# EAGLE board cpu (EAGLE 4.15), part 1 of 3
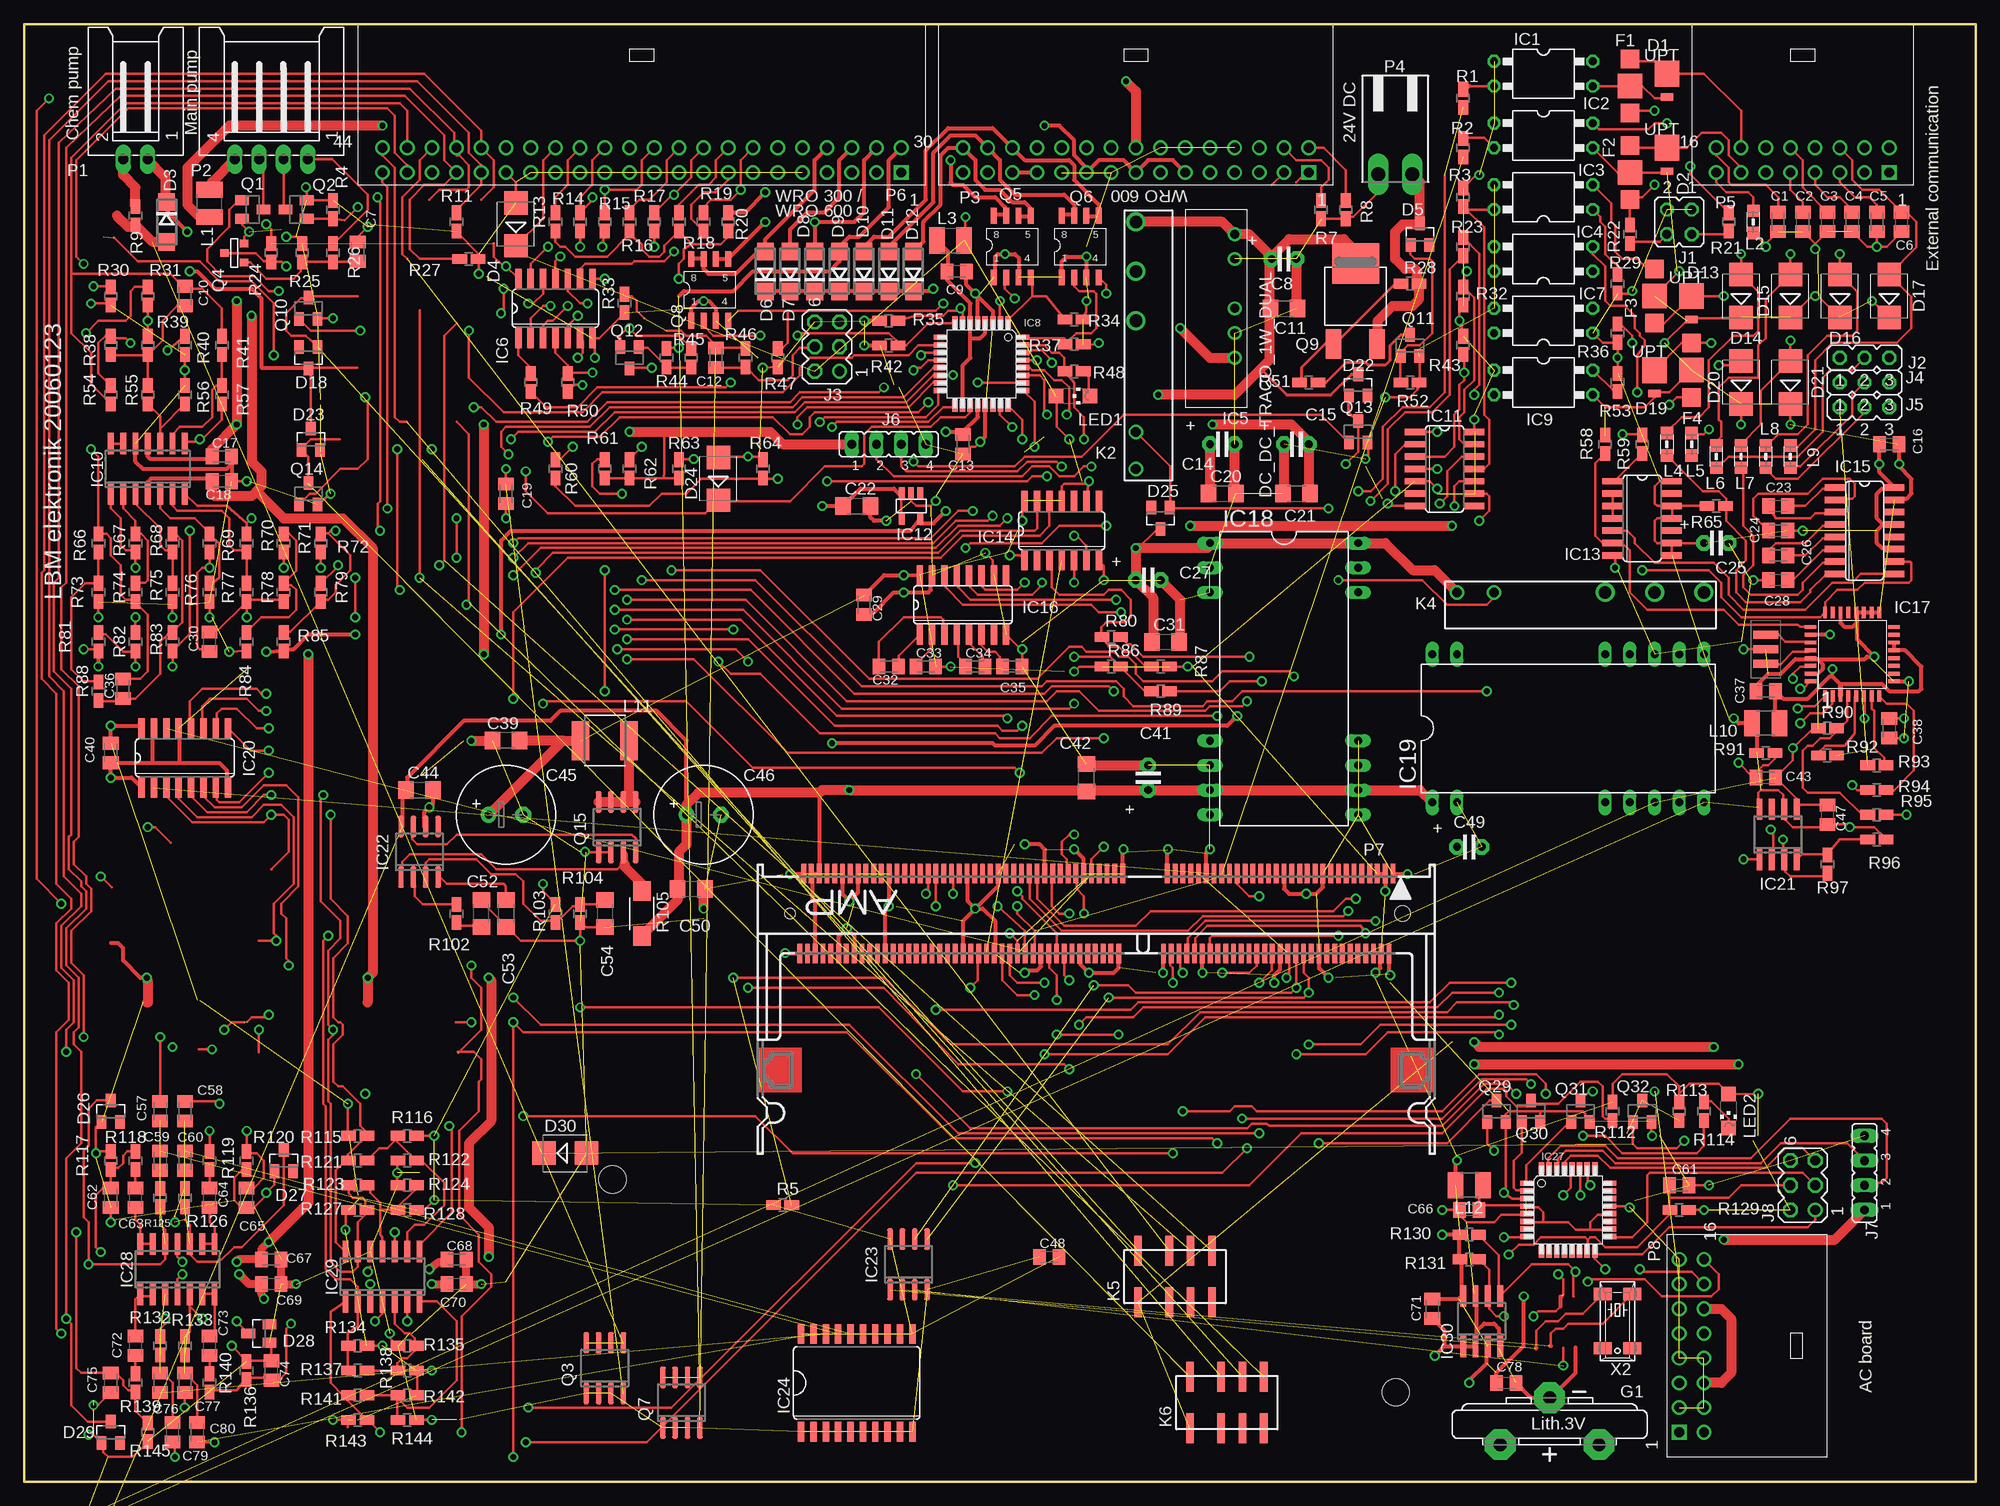
[diagram p0: board, top side]
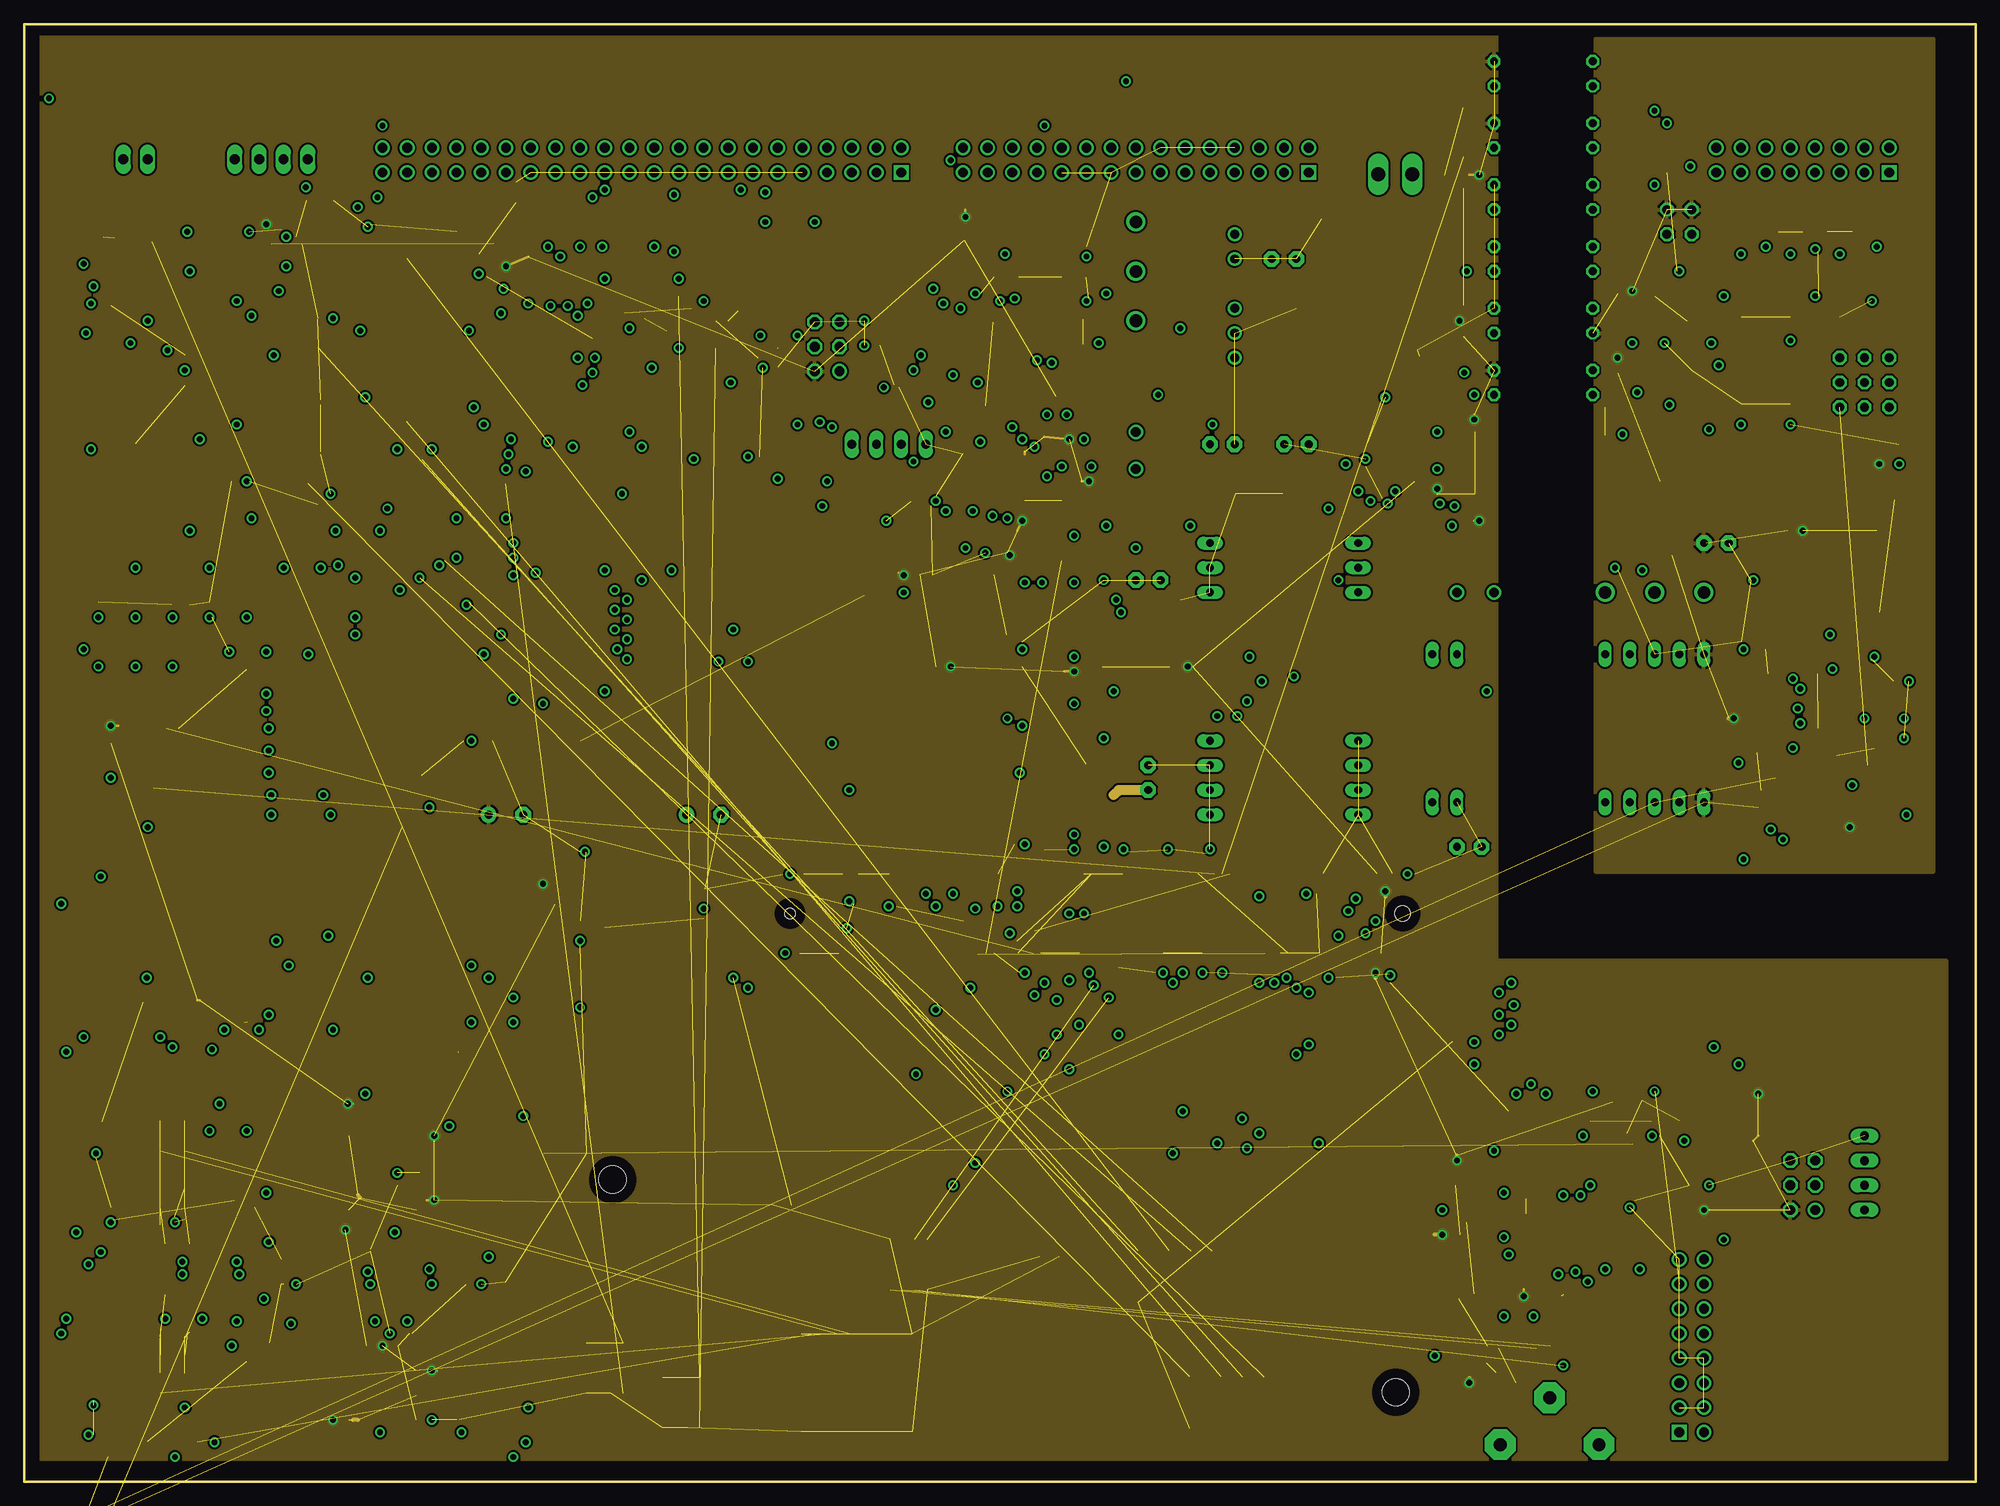
[diagram p1: board, inner layer Route2]
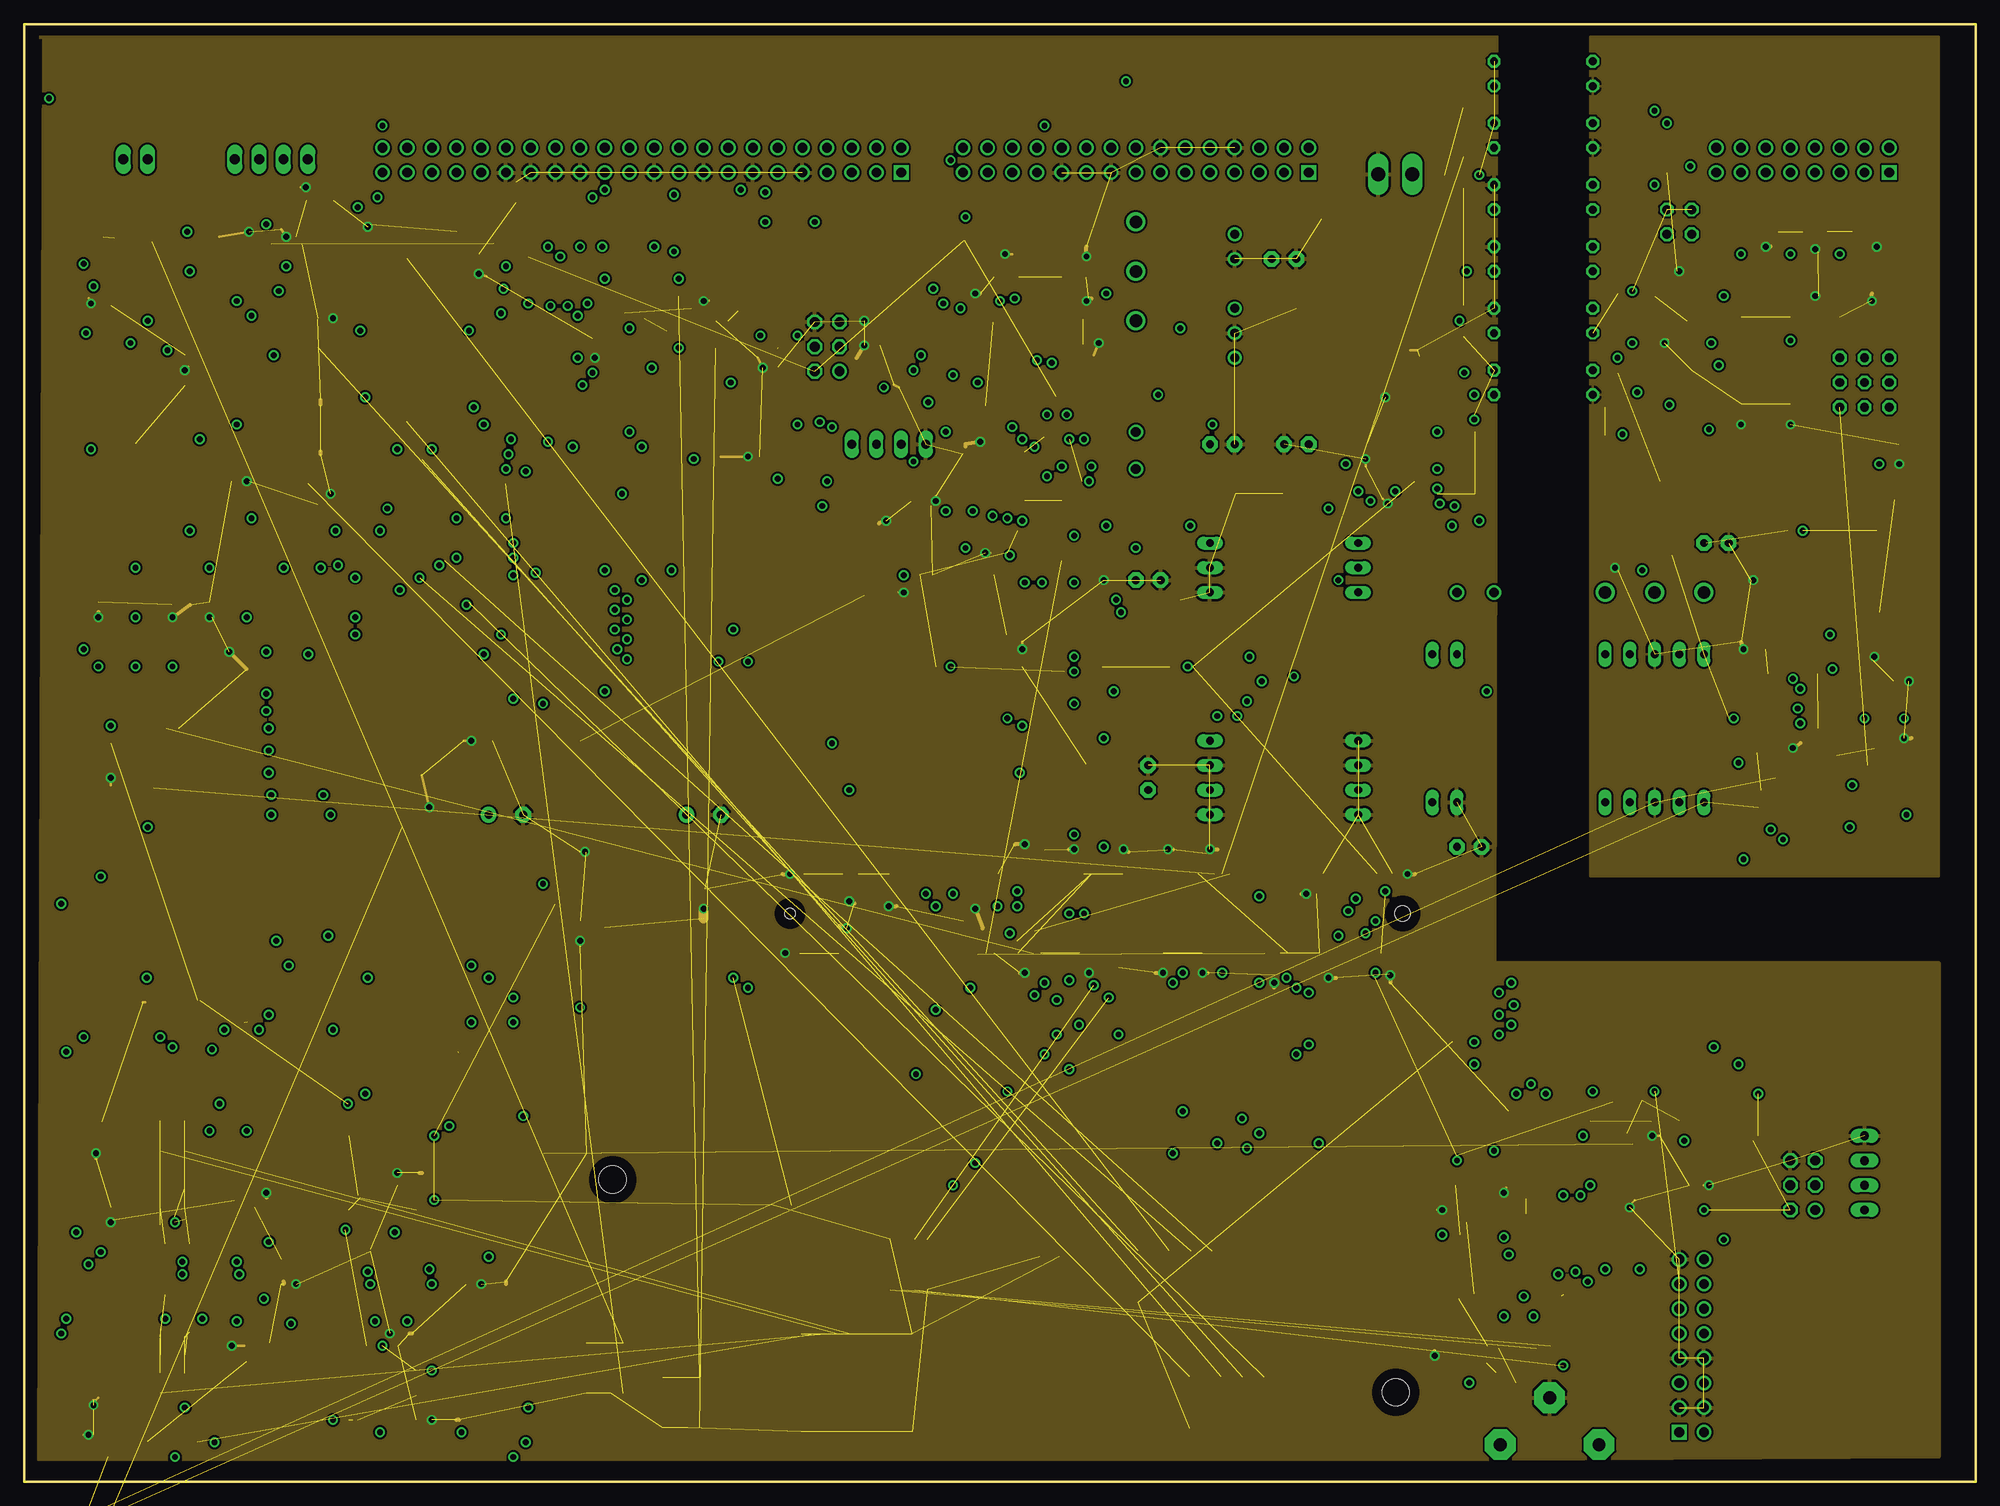
[diagram p2: board, inner layer Route15]
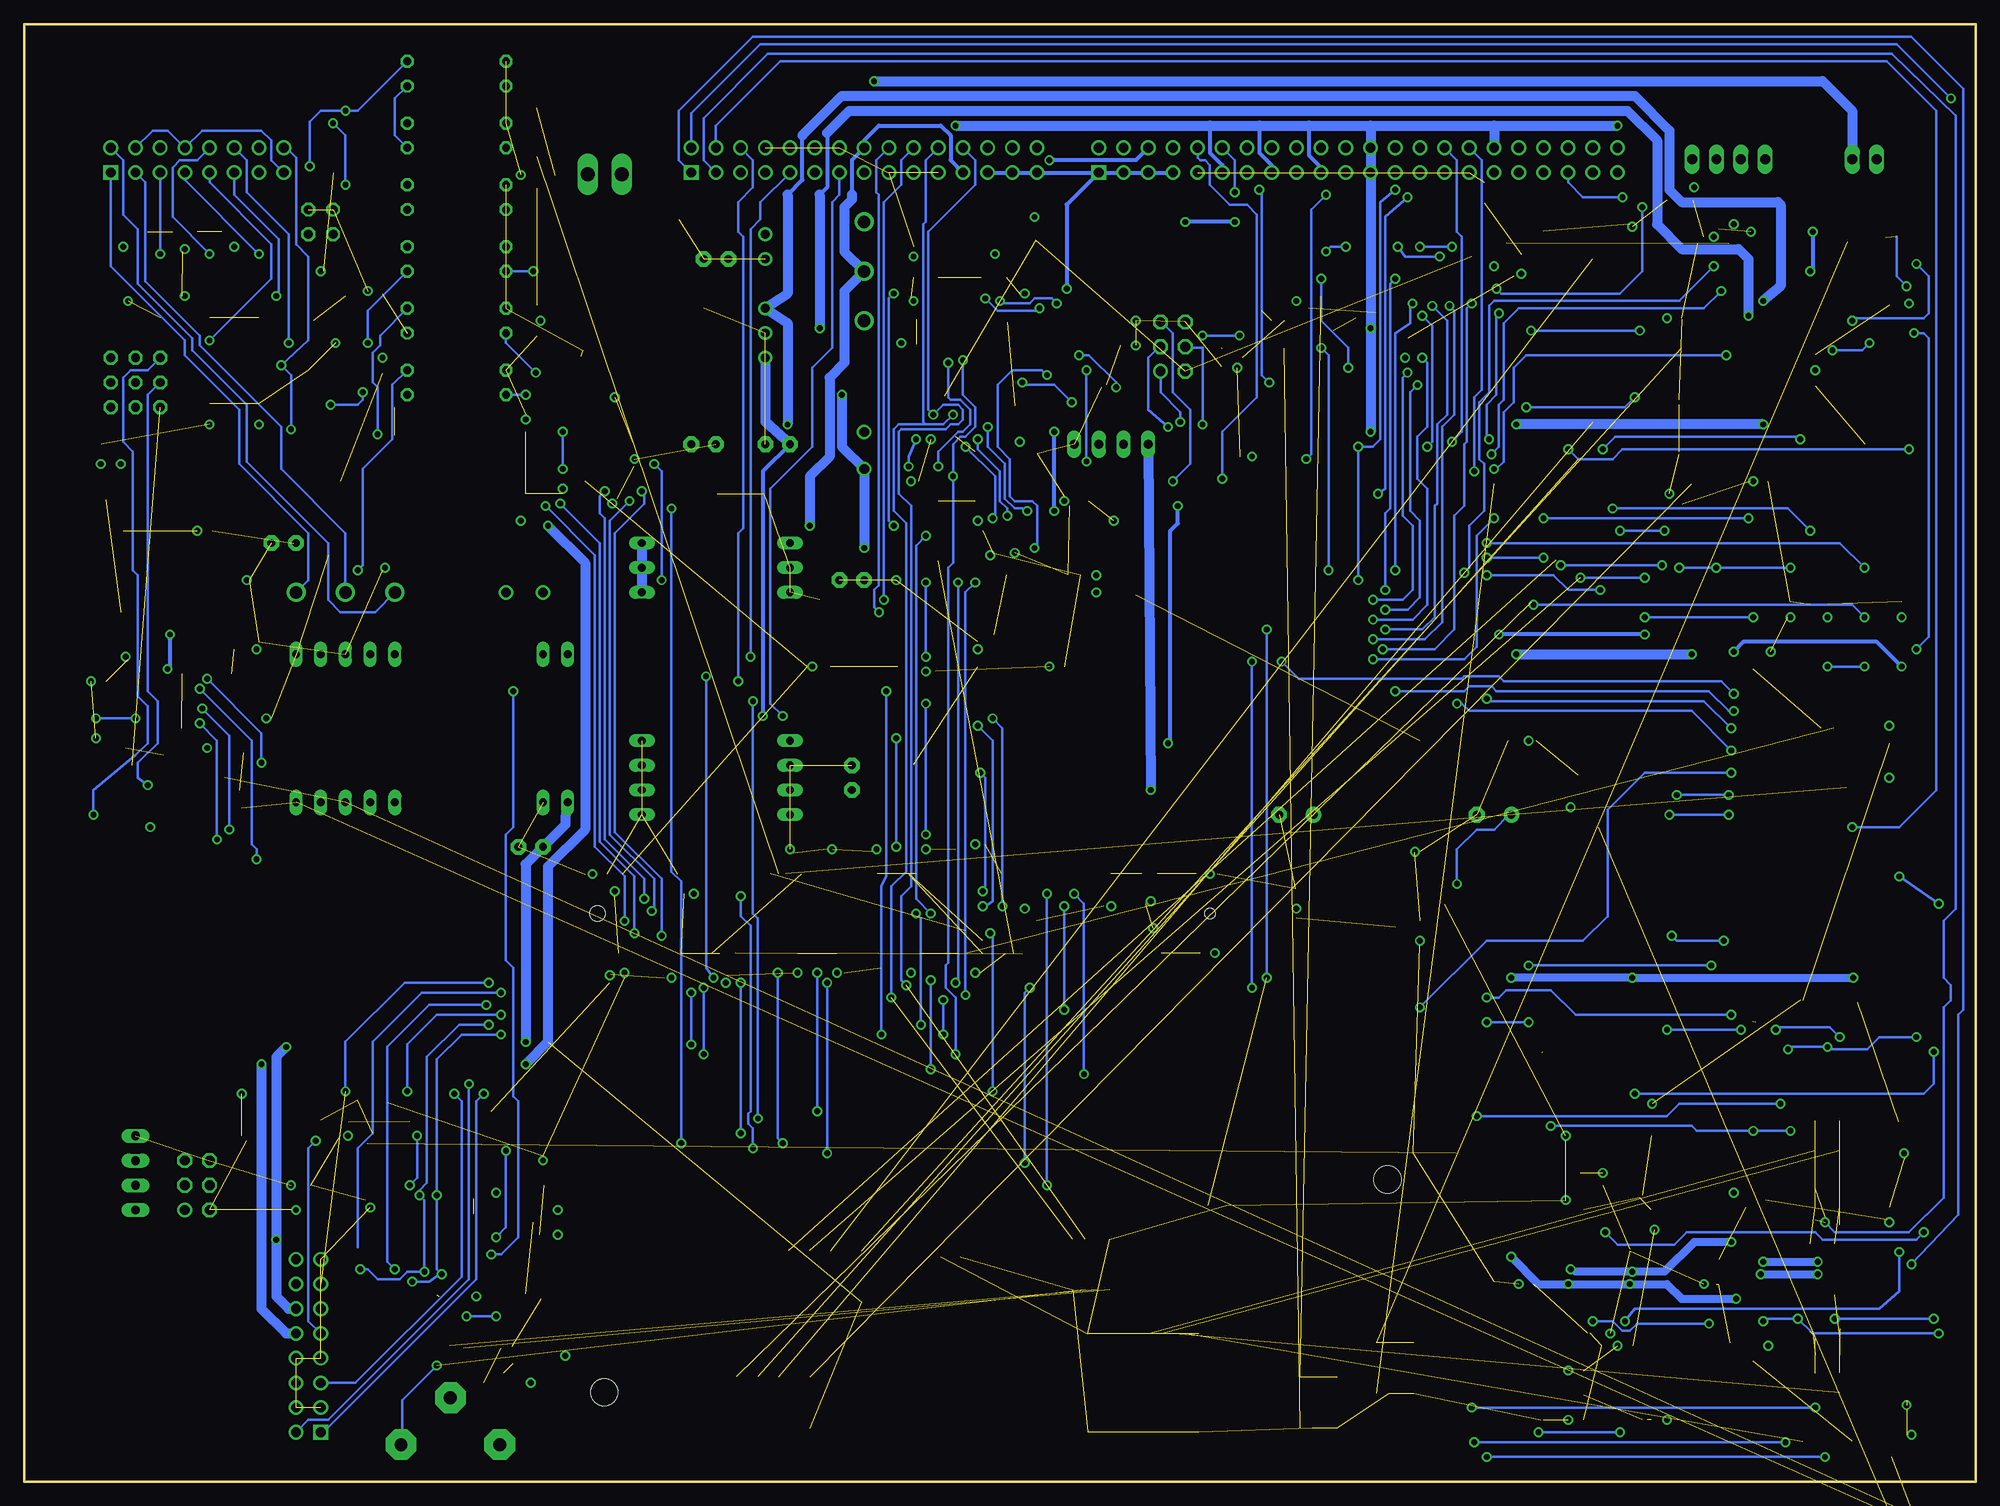
[diagram p3: board, bottom side, seen from below]

Size 200.66 x 149.86 mm. Coordinates in mm from the lower left corner, seen from the top.
Outline: 0,0 200.66,0 200.66,149.86 0,149.86 0,0
Copper layers (1*2+15*16): Top 0.035mm / dielectric 1.5mm / Route2 0.035mm / dielectric 0.15mm / Route15 0.035mm / dielectric 0.2mm / Bottom 0.035mm
Design rules "default": minimum track width 10mil, minimum drill 23mil, track to track 8mil, track to pad 8mil, pad to pad 8mil, via to via 8mil, smd to smd 8mil, copper to edge 40mil, drill to drill 8mil, minimum pad ring 10mil, minimum via ring 8mil, stop-mask expansion 4mil, vias tented up to drill 0mil, thermal gap 10mil
Holes 2.8 mm at 141.03,9.19 60.49,31.06
tKeepout: area 51.8,1.3 to 72.1,55.9; area 76.2,1.3 to 143.5,48.3; area 165.1,41.9 to 188,64.8

## Footprints (pad centres in the part's own frame; a part is rotated, then mirrored left to right if it is on the bottom)
C0805K = smd 1.3 x 1.6: 1 -1,0; 2 1,0
CAP2.5 = drill 0.813 pad 1.6 octagon: 1 -2.54,0; 2 0,0
C1206 = smd 1.6 x 1.8: 1 -1.4,0; 2 1.4,0
E3,5-10 = drill 0.813 pad 1.6 round: + -1.778,0 | drill 0.813 pad 1.6 octagon: - 1.778,0
UPT = smd 1.27 x 0.762: P$1 0,2.413 | smd 2.54 x 2.667: P$2 0,0
DO214AC = smd 1.8 x 1.7: A 2.05,0; C -2.05,0
SMB = smd 2.4 x 2.4: A 2.2,0; C -2.2,0
SOT23 = smd 1 x 1.4: 1 -0.95,-1.1; 2 0.95,-1.1; 3 0,1.1
T_FILTER = smd 2.54 x 2.54: P$1 0,0 | smd 1.905 x 1.905: P$2 -2.794,0; P$3 2.794,0
CR2032V = drill 1.321 pad 3.15 octagon: + -2.54,-5.08; +@1 -2.54,5.08; - 2.286,0
DIL04B = drill 0.813 octagon: 1 -1.27,-5.08; 2 1.27,-5.08; 3 1.27,5.08; 4 -1.27,5.08
DC_DC_TRACO_1W_DUAL = drill 0.9 round: 1 -5.08,3.81; 2 -2.54,3.81; 3 2.54,3.81; 4 5.08,3.81; 5 7.62,3.81
SO14 = smd 0.66 x 2.032: 1 -3.81,-3.073; 2 -2.54,-3.073; 3 -1.27,-3.073; 4 0,-3.073; 5 1.27,-3.073; 6 2.54,-3.073; 7 3.81,-3.073; 8 3.81,3.073; 9 2.54,3.073; 10 1.27,3.073; 11 0,3.073; 12 -1.27,3.073; 13 -2.54,3.073; 14 -3.81,3.073
TQFP-32 = smd 1.27 x 0.559: 1 -4.293,2.743; 2 -4.293,1.956; 3 -4.293,1.168; 4 -4.293,0.381; 5 -4.293,-0.381; 6 -4.293,-1.168; 7 -4.293,-1.956; 8 -4.293,-2.743; 17 4.293,-2.743; 18 4.293,-1.956; 19 4.293,-1.168; 20 4.293,-0.381; 21 4.293,0.381; 22 4.293,1.168; 23 4.293,1.956; 24 4.293,2.743 | smd 0.559 x 1.27: 9 -2.743,-4.293; 10 -1.956,-4.293; 11 -1.168,-4.293; 12 -0.381,-4.293; 13 0.381,-4.293; 14 1.168,-4.293; 15 1.956,-4.293; 16 2.743,-4.293; 25 2.743,4.293; 26 1.956,4.293; 27 1.168,4.293; 28 0.381,4.293; 29 -0.381,4.293; 30 -1.168,4.293; 31 -1.956,4.293; 32 -2.743,4.293
SO14' = smd 0.6 x 2.2: 1 -3.81,-2.6; 2 -2.54,-2.6; 3 -1.27,-2.6; 4 0,-2.6; 5 1.27,-2.6; 6 2.54,-2.6; 7 3.81,-2.6; 8 3.81,2.6; 9 2.54,2.6; 10 1.27,2.6; 11 0,2.6; 12 -1.27,2.6; 13 -2.54,2.6; 14 -3.81,2.6
SOT23-5 = smd 0.6 x 1.2: 1 -0.95,-1.306; 2 0,-1.306; 3 0.95,-1.306; 4 0.95,1.306; 5 -0.95,1.306
SO16 = smd 0.66 x 2.032: 1 -4.445,-3.073; 2 -3.175,-3.073; 3 -1.905,-3.073; 4 -0.635,-3.073; 5 0.635,-3.073; 6 1.905,-3.073; 7 3.175,-3.073; 8 4.445,-3.073; 9 4.445,3.073; 10 3.175,3.073; 11 1.905,3.073; 12 0.635,3.073; 13 -0.635,3.073; 14 -1.905,3.073; 15 -3.175,3.073; 16 -4.445,3.073
LQFP32 = smd 0.4 x 1.2: 1 -2.8,-4.3; 2 -2,-4.3; 3 -1.2,-4.3; 4 -0.4,-4.3; 5 0.4,-4.3; 6 1.2,-4.3; 7 2,-4.3; 8 2.8,-4.3; 17 2.8,4.3; 18 2,4.3; 19 1.2,4.3; 20 0.4,4.3; 21 -0.4,4.3; 22 -1.2,4.3; 23 -2,4.3; 24 -2.8,4.3 | smd 1.2 x 0.4: 9 4.3,-2.8; 10 4.3,-2; 11 4.3,-1.2; 12 4.3,-0.4; 13 4.3,0.4; 14 4.3,1.2; 15 4.3,2; 16 4.3,2.8; 25 -4.3,2.8; 26 -4.3,2; 27 -4.3,1.2; 28 -4.3,0.4; 29 -4.3,-0.4; 30 -4.3,-1.2; 31 -4.3,-2; 32 -4.3,-2.8
DIL_TRACO_DCDC = drill 0.813 long: 1 -13.97,-7.62; 2 -11.43,-7.62; 3 -8.89,-7.62; 9 6.35,-7.62; 10 8.89,-7.62; 11 11.43,-7.62; 12 13.97,-7.62; 13 13.97,7.62; 14 11.43,7.62; 15 8.89,7.62; 16 6.35,7.62; 22 -8.89,7.62; 23 -11.43,7.62; 24 -13.97,7.62
DIL_NMSC_DCDC = drill 0.813 long: 1 -13.97,-7.62; 2 -11.43,-7.62; 8 3.81,-7.62; 9 6.35,-7.62; 10 8.89,-7.62; 11 11.43,-7.62; 12 13.97,-7.62; 13 13.97,7.62; 14 11.43,7.62; 15 8.89,7.62; 16 6.35,7.62; 17 3.81,7.62; 23 -11.43,7.62; 24 -13.97,7.62
SO-08 = smd 0.6 x 2.2: 1 -1.905,-2.6; 2 -0.635,-2.6; 3 0.635,-2.6; 4 1.905,-2.6; 5 1.905,2.6; 6 0.635,2.6; 7 -0.635,2.6; 8 -1.905,2.6
SO8 = smd 0.6 x 2.2: 1 -1.905,-2.6; 2 -0.635,-2.6; 3 0.635,-2.6; 4 1.905,-2.6; 5 1.905,2.6; 6 0.635,2.6; 7 -0.635,2.6; 8 -1.905,2.6
SO20W = smd 0.66 x 2.032: 1 -5.715,-5.029; 2 -4.445,-5.029; 3 -3.175,-5.029; 4 -1.905,-5.029; 5 -0.635,-5.029; 6 0.635,-5.029; 7 1.905,-5.029; 8 3.175,-5.029; 9 4.445,-5.029; 10 5.715,-5.029; 11 5.715,5.029; 12 4.445,5.029; 13 3.175,5.029; 14 1.905,5.029; 15 0.635,5.029; 16 -0.635,5.029; 17 -1.905,5.029; 18 -3.175,5.029; 19 -4.445,5.029; 20 -5.715,5.029
JP2Q = drill 0.914 octagon: 1 -1.27,-1.27; 2 -1.27,1.27; 3 1.27,-1.27; 4 1.27,1.27
JUMPER3 = drill 0.914 octagon: 1 -2.54,-1.27; 2 0,-1.27; 3 2.54,-1.27
MA03-2 = drill 1.016 round: 1 -2.54,-1.27 | drill 1.016 octagon: 2 -2.54,1.27; 3 0,-1.27; 4 0,1.27; 5 2.54,-1.27; 6 2.54,1.27
JP4 = drill 0.914 long: 1 -3.81,0; 2 -1.27,0; 3 1.27,0; 4 3.81,0
SNR-V = drill 1.3 round: 11 7.62,1.27; 12 2.54,1.27; 14 12.7,1.27 | drill 1 round: A1 -12.7,1.27; A2 -8.89,1.27
GN-A = smd 0.8 x 3.1: 1 -3.835,-2.65; 2 -0.635,-2.65; 3 1.565,-2.65; 4 3.765,-2.65; 5 3.765,2.65; 6 1.565,2.65; 7 -0.635,2.65; 8 -3.835,2.65
C1210 = smd 1.6 x 2.7: 1 -2.67,2.54; 2 0.13,2.54
IND_BLM = smd 1.27 x 1.27: P$1 -1.143,0; P$2 1.143,0
L5650M = smd 1.8 x 4: 1 -2.5,0; 2 2.5,0
CHIPLED_1206 = smd 1.5 x 1.5: A 0,-1.75; C 0,1.75
L02P = drill 1.016 long: 1 1.25,-6.25; 2 -1.25,-6.25
L04P = drill 1.016 long: 1 3.75,-6.25; 2 1.25,-6.25; 3 -1.25,-6.25; 4 -3.75,-6.25
MODU30 = drill 1 square: 1 22.86,-5.08 | drill 1 round: 2 20.32,-5.08; 3 17.78,-5.08; 4 15.24,-5.08; 5 12.7,-5.08; 6 10.16,-5.08; 7 7.62,-5.08; 8 5.08,-5.08; 9 2.54,-5.08; 10 0,-5.08; 11 -2.54,-5.08; 12 -5.08,-5.08; 13 -7.62,-5.08; 14 -10.16,-5.08; 15 -12.7,-5.08; 16 22.86,-2.54; 17 20.32,-2.54; 18 17.78,-2.54; 19 15.24,-2.54; 20 12.7,-2.54; 21 10.16,-2.54; 22 7.62,-2.54; 23 5.08,-2.54; 24 2.54,-2.54; 25 0,-2.54; 26 -2.54,-2.54; 27 -5.08,-2.54; 28 -7.62,-2.54; 29 -10.16,-2.54; 30 -12.7,-2.54
90-2 = drill 1.422 long: 1 -1.75,5.25; 2 1.75,5.25
MODU16 = drill 1 square: P$1 13.97,-5.08 | drill 1 round: P$2 11.43,-5.08; P$3 8.89,-5.08; P$4 6.35,-5.08; P$5 3.81,-5.08; P$6 1.27,-5.08; P$7 -1.27,-5.08; P$8 -3.81,-5.08; P$13 13.97,-2.54; P$14 11.43,-2.54; P$15 8.89,-2.54; P$16 6.35,-2.54; P$17 3.81,-2.54; P$18 1.27,-2.54; P$19 -1.27,-2.54; P$20 -3.81,-2.54
MODU44 = drill 1 square: P$1 0,0 | drill 1 round: P$2 -2.54,0; P$3 -5.08,0; P$4 -7.62,0; P$5 -10.16,0; P$6 -12.7,0; P$7 -15.24,0; P$8 -17.78,0; P$9 -20.32,0; P$10 -22.86,0; P$11 -25.4,0; P$12 -27.94,0; P$13 -30.48,0; P$14 -33.02,0; P$15 -35.56,0; P$16 -38.1,0; P$17 -40.64,0; P$18 -43.18,0; P$19 -45.72,0; P$20 -48.26,0; P$21 -50.8,0; P$22 -53.34,0; P$23 0,2.54; P$24 -2.54,2.54; P$25 -5.08,2.54; P$26 -7.62,2.54; P$27 -10.16,2.54; P$28 -12.7,2.54; P$29 -15.24,2.54; P$30 -17.78,2.54; P$31 -20.32,2.54; P$32 -22.86,2.54; P$33 -25.4,2.54; P$34 -27.94,2.54; P$35 -30.48,2.54; P$36 -33.02,2.54; P$37 -35.56,2.54; P$38 -38.1,2.54; P$39 -40.64,2.54; P$40 -43.18,2.54; P$41 -45.72,2.54; P$42 -48.26,2.54; P$43 -50.8,2.54; P$44 -53.34,2.54
AMP390113-1 = smd 0.5 x 2: 1 -30.5,-12.99; 2 -29.7,-12.99; 3 -28.9,-12.99; 4 -28.1,-12.99; 5 -27.3,-12.99; 6 -26.5,-12.99; 7 -25.7,-12.99; 8 -24.9,-12.99; 9 -24.1,-12.99; 10 -23.3,-12.99; 11 -22.5,-12.99; 12 -21.7,-12.99; 13 -20.9,-12.99; 14 -20.1,-12.99; 15 -19.3,-12.99; 16 -18.5,-12.99; 17 -17.7,-12.99; 18 -16.9,-12.99; 19 -16.1,-12.99; 20 -15.3,-12.99; 21 -14.5,-12.99; 22 -13.7,-12.99; 23 -12.9,-12.99; 24 -12.1,-12.99; 25 -11.3,-12.99; 26 -10.5,-12.99; 27 -9.7,-12.99; 28 -8.9,-12.99; 29 -8.1,-12.99; 30 -7.3,-12.99; 31 -2.7,-12.99; 32 -1.9,-12.99; 33 -1.1,-12.99; 34 -0.3,-12.99; 35 0.5,-12.99; 36 1.3,-12.99; 37 2.1,-12.99; 38 2.9,-12.99; 39 3.7,-12.99; 40 4.5,-12.99; 41 5.3,-12.99; 42 6.1,-12.99; 43 6.9,-12.99; 44 7.7,-12.99; 45 8.5,-12.99; 46 9.3,-12.99; 47 10.1,-12.99; 48 10.9,-12.99; 49 11.7,-12.99; 50 12.5,-12.99; 51 13.3,-12.99; 52 14.1,-12.99; 53 14.9,-12.99; 54 15.7,-12.99; 55 16.5,-12.99; 56 17.3,-12.99; 57 18.1,-12.99; 58 18.9,-12.99; 59 19.7,-12.99; 60 20.5,-12.99; 61 21.3,-12.99; 62 22.1,-12.99; 63 22.9,-12.99; 64 23.7,-12.99; 65 24.5,-12.99; 66 25.3,-12.99; 67 26.1,-12.99; 68 26.9,-12.99; 69 27.7,-12.99; 70 28.5,-12.99; 71 29.3,-12.99; 72 30.1,-12.99; 73 -30.1,-4.79; 74 -29.3,-4.79; 75 -28.5,-4.79; 76 -27.7,-4.79; 77 -26.9,-4.79; 78 -26.1,-4.79; 79 -25.3,-4.79; 80 -24.5,-4.79; 81 -23.7,-4.79; 82 -22.9,-4.79; 83 -22.1,-4.79; 84 -21.3,-4.79; 85 -20.5,-4.79; 86 -19.7,-4.79; 87 -18.9,-4.79; 88 -18.1,-4.79; 89 -17.3,-4.79; 90 -16.5,-4.79; 91 -15.7,-4.79; 92 -14.9,-4.79; 93 -14.1,-4.79; 94 -13.3,-4.79; 95 -12.5,-4.79; 96 -11.7,-4.79; 97 -10.9,-4.79; 98 -10.1,-4.79; 99 -9.3,-4.79; 100 -8.5,-4.79; 101 -7.7,-4.79; 102 -6.9,-4.79; 103 -2.3,-4.79; 104 -1.5,-4.79; 105 -0.7,-4.79; 106 0.1,-4.79; 107 0.9,-4.79; 108 1.7,-4.79; 109 2.5,-4.79; 110 3.3,-4.79; 111 4.1,-4.79; 112 4.9,-4.79; 113 5.7,-4.79; 114 6.5,-4.79; 115 7.3,-4.79; 116 8.1,-4.79; 117 8.9,-4.79; 118 9.7,-4.79; 119 10.5,-4.79; 120 11.3,-4.79; 121 12.1,-4.79; 122 12.9,-4.79; 123 13.7,-4.79; 124 14.5,-4.79; 125 15.3,-4.79; 126 16.1,-4.79; 127 16.9,-4.79; 128 17.7,-4.79; 129 18.5,-4.79; 130 19.3,-4.79; 131 20.1,-4.79; 132 20.9,-4.79; 133 21.7,-4.79; 134 22.5,-4.79; 135 23.3,-4.79; 136 24.1,-4.79; 137 24.9,-4.79; 138 25.7,-4.79; 139 26.5,-4.79; 140 27.3,-4.79; 141 28.1,-4.79; 142 28.9,-4.79; 143 29.7,-4.79; 144 30.5,-4.79 | hole 1.6: -31.5,-8.89 | hole 1.1: 31.5,-8.89
SOT-23 = smd 0.787 x 0.889: 1 0.025,-1.016; 2 -0.94,1.016; 3 0.991,1.016
SO8-2 = smd 0.61 x 1.626: 1 -2.54,-2.54; 2 -1.27,-2.54; 3 0,-2.54; 4 1.27,-2.54; 5 1.27,3.81; 6 0,3.81; 7 -1.27,3.81; 8 -2.54,3.81
DPAK = smd 1.6 x 2.997: 1 -2.261,-4.928; 3 2.21,-4.928 | smd 4.826 x 4.191: 4 0,3.353
R0805W = smd 1.5 x 1: 1 -0.94,0; 2 0.94,0
R2010W = smd 2 x 1.8: 1 -2.311,0; 2 2.311,0
MURATA_RESONATOR = smd 0.8 x 2.6: 1 -1.5,0; 2 0,0; 3 1.5,0
MM20SS = smd 1.27 x 1.88: 1 -2.794,-1.524; 2 2.794,-1.524; 3 2.794,1.524; 4 -2.794,1.524

## Placement (x,y rotation side)
C1  100n  [C0805K]  180.34,129.54 90 top
C2  100n  [C0805K]  182.88,129.54 90 top
C3  100n  [C0805K]  185.42,129.54 90 top
C4  100n  [C0805K]  187.96,129.54 90 top
C5  100n  [C0805K]  190.5,129.54 90 top
C6  100n  [C0805K]  193.04,129.54 90 top
C7  100n  [C0805K]  34.29,126.49 270 top
C8  47u/25V  [CAP2.5]  130.81,125.73 0 top
C9  100n  [C0805K]  95.89,124.46 180 top
C10  100n  [C0805K]  16.51,121.92 90 top
C11  100n  [C1206]  129.54,120.65 0 top
C12  NM  [C0805K]  71.12,115.57 90 top
C13  100n  [C0805K]  96.52,106.68 90 top
C14  47u/25V  [CAP2.5]  124.46,106.68 0 top
C15  47u/25V  [CAP2.5]  132.08,106.68 0 top
C16  100n  [C0805K]  191.77,106.68 180 top
C17  100n  [C0805K]  20.32,105.41 0 top
C18  100n  [C0805K]  20.32,102.87 180 top
C19  1u0  [C0805K]  49.53,101.6 90 top
C20  100n  [C1206]  123.19,101.6 0 top
C21  100n  [C1206]  130.81,101.6 0 top
C22  100n  [C1206]  85.6,100.33 0 top
C23  100n  [C0805K]  180.34,100.33 0 top
C24  100n  [C0805K]  180.34,97.79 0 top
C25  47u/25V  [CAP2.5]  175.26,96.52 0 top
C26  100n  [C0805K]  180.34,95.25 180 top
C27  47u/50V  [CAP2.5]  116.84,92.71 0 top
C28  100n  [C0805K]  180.34,92.71 180 top
C29  100n  [C0805K]  86.36,90.17 270 top
C30  100n  [C0805K]  19.05,86.36 90 top
C31  100n  [C1206]  117.35,86.36 0 top
C32  100n  [C0805K]  88.9,83.82 180 top
C33  100n  [C0805K]  92.71,83.82 0 top
C34  100n  [C0805K]  97.79,83.82 0 top
C35  100n  [C0805K]  101.6,83.82 0 top
C36  100n  [C0805K]  10.16,81.53 90 top
C37  100n  [C0805K]  179.07,81.28 0 top
C38  100n  [C0805K]  191.77,77.47 270 top
C39  100n  [C1206]  49.53,76.2 180 top
C40  100n  [C0805K]  8.89,74.93 90 top
C41  47u/25V  [CAP2.5]  115.57,73.66 90 top
C42  100n  [C1206]  109.22,72.39 90 top
C43  100n  [C0805K]  179.07,72.39 0 top
C44  NM  [C1206]  40.64,71.12 0 top
C45  330uF  [E3,5-10]  49.53,68.58 0 top
C46  180uF  [E3,5-10]  69.85,68.58 0 top
C47  100n  [C0805K]  185.42,68.58 270 top
C48  100n  [C0805K]  105.41,23.11 0 top
C49  47u/25V  [CAP2.5]  149.86,65.28 0 top
C50  470p  [C1206]  68.58,60.96 0 top
C51  100n  [C0805K]  3.81,-5.08 0 top  (outside the outline)
C52  220p  [C1206]  46.99,58.42 90 top
C53  470p  [C1206]  49.53,58.42 270 top
C54  100p  [C1206]  59.69,58.42 270 top
C55  100n  [C0805K]  3.81,-12.7 0 top  (outside the outline)
C57  NM  [C0805K]  13.97,38.1 90 top
C58  NM  [C0805K]  16.51,38.1 90 top
C59  100n  [C0805K]  13.97,33.02 90 top
C60  470n  [C0805K]  16.51,33.02 90 top
C61  NM  [C0805K]  170.18,30.48 180 top
C62  100p  [C0805K]  8.89,29.21 90 top
C63  1u0  [C0805K]  11.43,29.21 90 top
C64  1u0  [C0805K]  19.05,29.21 90 top
C65  100p  [C0805K]  22.86,29.21 90 top
C66  100n  [C0805K]  148.59,27.94 0 top
C67  100n  [C0805K]  25.4,22.86 0 top
C68  100n  [C0805K]  44.45,22.86 0 top
C69  100n  [C0805K]  25.4,20.32 180 top
C70  100n  [C0805K]  44.45,20.32 180 top
C71  100n  [C0805K]  144.78,17.78 270 top
C72  1u0  [C0805K]  11.43,13.97 270 top
C73  1u0  [C0805K]  19.05,13.97 270 top
C74  100p  [C0805K]  25.4,11.43 270 top
C75  100p  [C0805K]  8.89,10.16 90 top
C76  100n  [C0805K]  13.97,10.16 270 top
C77  NM  [C0805K]  16.51,10.16 270 top
C78  100n  [C0805K]  152.4,10.16 0 top
C79  NM  [C0805K]  15.24,5.08 270 top
C80  470n  [C0805K]  17.78,5.08 270 top
D1  UPT  [UPT]  168.91,144.78 180 top
D2  UPT  [UPT]  168.91,137.16 180 top
D3  S1K  [DO214AC]  14.61,129.54 270 top
D4  SM6T  [SMB]  50.55,129.29 90 top
D5  BZX84-C12  [SOT23]  143.51,128.27 0 top
D6  S1K  [DO214AC]  76.2,124.46 90 top
D7  S1K  [DO214AC]  78.74,124.46 90 top
D8  S1K  [DO214AC]  81.28,124.46 90 top
D9  S1K  [DO214AC]  83.82,124.46 90 top
D10  S1K  [DO214AC]  86.36,124.46 90 top
D11  S1K  [DO214AC]  88.9,124.46 90 top
D12  S1K  [DO214AC]  91.44,124.46 90 top
D13  UPT  [UPT]  171.45,121.92 180 top
D14  SM6T  [SMB]  176.53,121.92 90 top
D15  SM6T  [SMB]  181.61,121.92 90 top
D16  SM6T  [SMB]  186.69,121.92 90 top
D17  SM6T  [SMB]  191.77,121.92 90 top
D18  BAS16  [SOT23]  29.21,115.57 180 top
D19  UPT  [UPT]  167.64,114.3 180 top
D20  SM6T  [SMB]  176.53,113.03 90 top
D21  SM6T  [SMB]  181.61,113.03 90 top
D22  BAS16  [SOT23]  137.16,112.78 0 top
D23  BAS16  [SOT23]  29.46,107.19 0 top
D24  SM6T  [SMB]  71.37,103.12 90 top
D25  BAS16  [SOT23]  116.84,99.06 180 top
D26  BAS16  [SOT23]  8.89,38.1 0 top
D27  BAS16  [SOT23]  26.67,33.02 0 top
D28  BAS16  [SOT23]  24.13,15.24 90 top
D29  BAS16  [SOT23]  8.89,5.08 0 top
D30  SM6T  [SMB]  55.63,33.78 0 top
F1  [T_FILTER]  165.1,143.51 90 top
F2  [T_FILTER]  165.1,134.62 90 top
F3  [T_FILTER]  167.64,121.92 270 top
F4  [T_FILTER]  171.45,114.3 90 top
G1  CR2032V  [CR2032V]  156.84,6.35 90 top
IC1  SFH617G  [DIL04B]  156.21,144.78 270 top
IC2  SFH617G  [DIL04B]  156.21,138.43 270 top
IC3  SFH617G  [DIL04B]  156.21,132.08 90 top
IC4  SFH617G  [DIL04B]  156.21,125.73 90 top
IC5  DC_DC_TRACO_1W_DUAL  [DC_DC_TRACO_1W_DUAL]  120.65,123.19 270 top
IC6  74HCT14D  [SO14]  54.61,120.65 0 top
IC7  SFH617G  [DIL04B]  156.21,119.38 90 top
IC8  ATMEGA8_TQFP  [TQFP-32]  98.42,114.94 270 top
IC9  SFH617G  [DIL04B]  156.21,113.03 270 top
IC10  OP747AR  [SO14']  12.7,104.14 0 top
IC11  74HCT14D  [SO14]  146.05,104.14 270 top
IC12  LM4120  [SOT23-5]  91.19,100.33 180 top
IC13  74HC02D  [SO14]  166.37,99.06 270 top
IC14  74HCT14D  [SO14]  106.68,97.79 0 top
IC15  MAX232A  [SO16]  189.23,97.79 270 top
IC16  MAX232A  [SO16]  96.52,90.17 0 top
IC17  FT232BM  [LQFP32]  187.96,85.09 0 top
IC18  DC_DC_TRACO_8W  [DIL_TRACO_DCDC]  129.54,82.55 270 top
IC19  DC_DC_NMSC  [DIL_NMSC_DCDC]  158.75,77.47 0 top
IC20  74HCT253D  [SO16]  16.51,74.42 0 top
IC21  93LC66SN  [SO-08]  180.34,66.55 0 top
IC22  LTC1622  [SO8]  40.64,64.77 0 top
IC23  M41T81  [SO8]  90.93,22.35 0 top
IC24  74HCT573D  [SO20W]  85.6,10.16 0 top
IC27  ATMEGA8_TQFP  [TQFP-32]  158.75,27.94 0 top
IC28  OP747R  [SO14']  15.75,21.84 0 top
IC29  LM339D  [SO14']  36.83,21.08 0 top
IC30  24AA64SN  [SO-08]  149.86,16.51 0 top
J1  [JP2Q]  170.18,129.54 180 top
J2  JUMPER3  [JUMPER3]  189.23,116.84 0 top
J3  [MA03-2]  82.55,116.71 90 top
J4  JUMPER3  [JUMPER3]  189.23,114.3 0 top
J5  JUMPER3  [JUMPER3]  189.23,111.76 0 top
J6  [JP4]  88.9,106.68 0 top
J7  [JP4]  189.23,31.75 90 top
J8  [MA03-2]  182.88,30.48 90 top
K2  SNR03024  [SNR-V]  115.57,116.84 90 top
K4  SNR03024  [SNR-V]  160.02,90.17 0 top
K5  GN200A1H  [GN-A]  118.36,21.08 0 top
K6  GN200A1H  [GN-A]  123.7,8.13 0 top
L1  L1210  [C1210]  21.59,132.72 90 top
L2  IND_BLM  [IND_BLM]  177.8,129.54 90 top
L3  L1210  [C1210]  96.52,125.09 0 top
L4  IND_BLM  [IND_BLM]  168.91,106.68 270 top
L5  IND_BLM  [IND_BLM]  171.45,106.68 270 top
L6  IND_BLM  [IND_BLM]  173.99,105.41 270 top
L7  IND_BLM  [IND_BLM]  176.53,105.41 270 top
L8  IND_BLM  [IND_BLM]  179.07,105.41 270 top
L9  IND_BLM  [IND_BLM]  181.61,105.41 270 top
L10  L1210  [C1210]  177.8,80.52 180 top
L11  [L5650M]  59.69,76.2 180 top
L12  L1210  [C1210]  147.32,33.02 180 top
LED1  [CHIPLED_1206]  107.82,111.63 270 top
LED2  [CHIPLED_1206]  175.26,38.1 180 top
P1  [L02P]  11.43,142.24 0 top
P2  [L04P]  25.4,142.24 0 top
P3  [MODU30]  109.22,139.7 0 top
P4  [90-2]  140.97,139.7 180 top
P5  [MODU16]  177.8,139.7 0 top
P6  [MODU44]  90.17,134.62 0 top
P7  AMP390113-1  [AMP390113-1]  110.24,49.53 180 top
P8  [MODU16]  175.26,19.05 270 top
Q1  BSS123  [SOT23]  23.5,130.81 270 top
Q2  BSS123  [SOT23]  27.94,130.81 90 top
Q3  IRF7471  [SO8]  59.69,11.68 0 top
Q4  BC847  [SOT-23]  21.59,126.36 270 top
Q5  IRF7103  [SO8-2]  102.23,126.36 0 top
Q6  IRF7103  [SO8-2]  109.22,126.36 0 top
Q7  IRF7471  [SO8]  67.56,8.13 0 top
Q8  IRF7103  [SO8-2]  71.12,121.92 0 top
Q9  IRFR5305  [DPAK]  136.91,121.92 0 top
Q10  BSS123  [SOT23]  29.21,120.65 0 top
Q11  BSS123  [SOT23]  142.49,116.84 0 top
Q12  FDV304P  [SOT23]  62.23,115.57 180 top
Q13  BSS123  [SOT23]  137.16,107.95 0 top
Q14  BSS123  [SOT23]  29.21,101.6 0 top
Q15  IRF7422  [SO8]  60.96,67.31 0 top
Q29  BSS123  [SOT23]  151.38,38.1 0 top
Q30  BSS123  [SOT23]  154.94,38.1 0 top
Q31  BSS123  [SOT23]  160.02,38.1 0 top
Q32  BSS123  [SOT23]  166.37,38.1 0 top
R1  470R  [R0805W]  147.96,142.24 90 top
R2  470R  [R0805W]  147.96,137.16 90 top
R3  2K21  [R0805W]  147.96,132.08 270 top
R4  10k  [R0805W]  31.75,130.81 90 top
R5  10k  [R0805W]  77.98,28.45 0 top
R7  0R  [R0805W]  133.35,130.81 90 top
R8  0R  [R0805W]  135.89,130.81 90 top
R9  [R0805W]  11.43,130.18 90 top
R11  0R  [R0805W]  44.45,129.54 90 top
R13  100R  [R0805W]  54.61,129.54 270 top
R14  10K  [R0805W]  57.15,129.54 90 top
R15  10K  [R0805W]  59.69,129.54 90 top
R16  100R  [R0805W]  62.23,129.54 270 top
R17  10K  [R0805W]  64.77,129.54 90 top
R18  100R  [R0805W]  67.31,129.54 270 top
R19  4K75  [R0805W]  69.85,129.54 270 top
R20  100R  [R0805W]  72.39,129.54 270 top
R21  2K21  [R0805W]  175.26,129.54 270 top
R22  2K21  [R0805W]  165.1,128.27 270 top
R23  470R  [R0805W]  147.96,127 90 top
R24  10k  [R0805W]  25.4,126.36 90 top
R25  10k  [R0805W]  28.57,126.36 270 top
R26  10k  [R0805W]  31.75,126.36 270 top
R27  0R  [R0805W]  45.72,125.73 180 top
R28  [R0805W]  142.49,123.19 0 top
R29  470R  [R0805W]  163.83,123.19 270 top
R30  100k  [R0805W]  8.89,121.92 90 top
R31  1K  [R0805W]  12.7,121.92 270 top
R32  2K21  [R0805W]  147.96,121.92 90 top
R33  10k  [R0805W]  61.72,121.16 90 top
R34  10k  [R0805W]  107.95,119.51 180 top
R35  10k  [R0805W]  88.9,119.38 0 top
R36  470R  [R0805W]  163.83,118.11 270 top
R37  10k  [R0805W]  107.95,116.97 180 top
R38  100R  [R0805W]  8.89,116.84 90 top
R39  100R  [R0805W]  12.7,116.84 270 top
R40  1K  [R0805W]  16.51,116.84 270 top
R41  1K  [R0805W]  20.32,116.84 270 top
R42  10k  [R0805W]  88.9,116.84 0 top
R43  2K21  [R0805W]  147.96,116.84 270 top
R44  3K3  [R0805W]  66.04,115.57 270 top
R45  1K  [R0805W]  68.58,115.57 90 top
R46  100R  [R0805W]  74.17,115.57 270 top
R47  10k  [R0805W]  77.47,115.57 90 top
R48  1k  [R0805W]  107.95,114.17 0 top
R49  10K  [R0805W]  52.07,113.03 270 top
R50  10k  [R0805W]  55.88,113.03 270 top
R51  [R0805W]  132.08,113.03 180 top
R52  2k2  [R0805W]  142.49,113.03 180 top
R53  2K21  [R0805W]  163.83,113.03 90 top
R54  100R  [R0805W]  8.89,111.76 90 top
R55  1K  [R0805W]  12.7,111.76 90 top
R56  220K  [R0805W]  16.51,111.76 270 top
R57  220K  [R0805W]  20.32,111.76 270 top
R58  10k  [R0805W]  162.56,106.68 90 top
R59  470R  [R0805W]  166.37,106.68 270 top
R60  10K  [R0805W]  54.61,104.14 270 top
R61  4K75  [R0805W]  59.69,104.14 270 top
R62  4K75  [R0805W]  62.23,104.14 270 top
R63  4K75  [R0805W]  67.31,104.14 270 top
R64  4K75  [R0805W]  75.95,104.14 90 top
R65  10k  [R0805W]  173.99,100.33 180 top
R66  100R  [R0805W]  7.62,96.52 270 top
R67  220K  [R0805W]  11.43,96.52 270 top
R68  1K  [R0805W]  15.24,96.52 90 top
R69  1K  [R0805W]  19.05,96.52 270 top
R70  220K  [R0805W]  22.86,96.52 90 top
R71  100R  [R0805W]  26.67,96.52 90 top
R72  100R  [R0805W]  30.48,96.52 270 top
R73  1K  [R0805W]  7.62,91.44 270 top
R74  1K  [R0805W]  11.43,91.44 90 top
R75  220K  [R0805W]  15.24,91.44 90 top
R76  220K  [R0805W]  19.05,91.44 90 top
R77  1K  [R0805W]  22.86,91.44 90 top
R78  100R  [R0805W]  26.67,91.44 90 top
R79  137R  [R0805W]  30.48,91.44 90 top
R80  10k  [R0805W]  111.76,86.87 0 top
R81  1K  [R0805W]  7.62,86.36 90 top
R82  137R  [R0805W]  11.43,86.36 90 top
R83  100R  [R0805W]  15.24,86.36 90 top
R84  1K  [R0805W]  22.86,86.36 270 top
R85  1K  [R0805W]  26.67,86.36 90 top
R86  1k  [R0805W]  111.76,83.82 180 top
R87  1k  [R0805W]  116.84,83.82 0 top
R88  100R  [R0805W]  7.62,81.28 90 top
R89  10k  [R0805W]  116.84,81.28 0 top
R90  10k  [R0805W]  185.42,77.47 0 top
R91  470R  [R0805W]  179.07,74.93 180 top
R92  1k5  [R0805W]  185.42,74.68 0 top
R93  27R  [R0805W]  190.5,73.66 180 top
R94  27R  [R0805W]  190.5,71.12 180 top
R95  4k7  [R0805W]  190.5,68.58 0 top
R96  10k  [R0805W]  190.5,66.04 0 top
R97  2k2  [R0805W]  185.42,63.5 270 top
R102  2k2  [R0805W]  44.45,58.42 270 top
R103  2k2  [R0805W]  54.61,58.42 90 top
R104  2k2  [R0805W]  57.15,58.42 90 top
R105  0R025  [R2010W]  63.5,58.42 270 top
R112  10K  [R0805W]  163.32,38.1 90 top
R113  1k  [R0805W]  170.18,38.1 90 top
R114  2K21  [R0805W]  172.72,38.1 90 top
R115  3k32  [R0805W]  34.29,35.56 180 top
R116  6k81  [R0805W]  39.37,35.56 180 top
R117  560k  [R0805W]  8.89,33.02 90 top
R118  150k  [R0805W]  11.43,33.02 90 top
R119  150k  [R0805W]  19.05,33.02 90 top
R120  560k  [R0805W]  22.86,33.02 270 top
R121  NM  [R0805W]  34.29,33.02 180 top
R122  3k92  [R0805W]  39.37,33.02 180 top
R123  NM  [R0805W]  34.29,30.48 180 top
R124  3k92  [R0805W]  39.37,30.48 180 top
R125  10R  [R0805W]  13.97,29.21 270 top
R126  3k32  [R0805W]  16.51,29.21 270 top
R127  3k32  [R0805W]  34.29,27.94 180 top
R128  6k81  [R0805W]  39.37,27.94 180 top
R129  2k21  [R0805W]  170.18,27.94 0 top
R130  [R0805W]  148.59,25.4 180 top
R131  [R0805W]  148.59,22.86 180 top
R132  10R  [R0805W]  13.97,13.97 90 top
R133  3k32  [R0805W]  16.51,13.97 90 top
R134  3k32  [R0805W]  34.29,13.97 0 top
R135  3k92  [R0805W]  39.37,13.97 180 top
R136  560k  [R0805W]  22.86,11.43 90 top
R137  NM  [R0805W]  34.29,11.43 180 top
R138  6k81  [R0805W]  39.37,11.43 180 top
R139  150k  [R0805W]  11.43,10.16 270 top
R140  150k  [R0805W]  19.05,10.16 270 top
R141  NM  [R0805W]  34.29,8.89 180 top
R142  6k81  [R0805W]  39.37,8.89 180 top
R143  3k32  [R0805W]  34.29,6.35 180 top
R144  3k92  [R0805W]  39.37,6.35 0 top
R145  560k  [R0805W]  12.7,5.08 270 top
X1  MURATA_RESONATOR  [MURATA_RESONATOR]  179.07,85.6 90 top
X2  32768 Hz  [MM20SS]  163.83,16.51 270 top

## Library data of the parts
C1-C7 C9-C13 C16-C24 C26 C28-C40 C42-C48 C50-C55 C57-C80 L11 R1-R5 R7-R9 R11 R13-R97 R102-R105 R112-R145 = rcl
C8 C14 C15 C25 C27 C41 C49 D1-D4 D6-D30 F1-F4 IC5 IC12 IC15 IC16 IC18 IC19 IC22 IC23 J2 J4 J5 L1-L10 L12 P3 P5-P8 Q3 Q7 Q9 Q15 X1 = lbm
D5 = diode
G1 = battery
IC1-IC4 IC7 IC9 = optocoupler
IC6 IC11 IC13 IC14 IC20 IC24 = 74xx-eu
IC8 IC27 = atmel_prototype_header
IC10 IC28 IC29 = linear
IC17 = ftdi3
IC21 IC30 = microchip
J1 J6 J7 = jumper
J3 J8 = con-lstb
K2 K4-K6 = relay
LED1 LED2 = led
P1 P2 = con-amp-mt
P4 = con-weidmueller-sl35
Q1 Q2 Q10-Q14 Q29-Q32 = transistor-small-signal
Q4 = zetex
Q5 Q6 Q8 = irf-2
X2 = crystal

## Nets
0V: C7.1 C8.2 C9.1 C11.2 C13.1 C14.2 C15.1 C17.2 C18.1 C20.2 C21.1 C22.2 C27.2 C29.2 C31.2 C35.2 C39.2 C40.1 C41.2 C42.2 C44.2 C45.- C46.- C48.1 C49.2 C50.2 C52.2 C53.2 C54.2 C55.1 C61.1 C62.1 C65.1 C66.1 C67.2 C68.2 C69.1 C70.1 C71.2 C74.1 C75.1 C78.2 D4.A D24.A D26.1 D27.1 D28.1 D29.1 D30.A G1.- IC3.3 IC4.3 IC5.2 IC5.4 IC6.7 IC7.3 IC8.3 IC8.5 IC8.21 IC10.12 IC11.7 IC12.2 IC14.7 IC16.8 IC16.10 IC16.15 IC18.2 IC18.3 IC18.10 IC18.12 IC18.13 IC18.15 IC18.16 IC19.2 IC20.1 IC20.8 IC20.13 IC20.15 IC22.6 IC23.4 IC24.1 IC24.6 IC24.7 IC24.8 IC24.9 IC24.10 IC27.3 IC27.5 IC27.21 IC29.12 IC30.1 IC30.2 IC30.4 IC30.7 J3.6 J6.4 J7.4 J8.6 P3.9 P3.11 P3.19 P3.22 P4.2 P6.P$5 P6.P$7 P6.P$9 P6.P$11 P6.P$14 P6.P$15 P6.P$16 P6.P$17 P7.1 P7.10 P7.15 P7.25 P7.30 P7.31 P7.36 P7.41 P7.47 P7.51 P7.61 P7.65 P7.67 P7.72 P7.73 P7.82 P7.87 P7.97 P7.102 P7.103 P7.108 P7.113 P7.119 P7.123 P7.133 P7.137 P7.139 P7.144 P8.P$2 P8.P$4 P8.P$8 P8.P$14 P8.P$16 Q1.2 Q2.2 Q3.1 Q3.2 Q3.3 Q4.2 Q5.1 Q5.3 Q6.1 Q6.3 Q7.1 Q7.2 Q7.3 Q8.1 Q8.3 Q10.2 Q11.2 Q13.2 Q14.2 Q15.1 Q15.2 Q29.2 Q30.2 Q31.2 Q32.2 R4.2 R7.1 R8.1 R11.1 R25.1 R27.1 R30.1 R33.1 R34.1 R35.1 R37.1 R40.2 R42.1 R47.1 R52.1 R56.1 R64.2 R73.2 R75.1 R76.1 R84.2 R104.1 R117.2 R120.2 R122.2 R124.2 R135.2 R136.2 R144.2 R145.2
+3V3: C29.1 C33.2 C39.1 C40.2 C45.+ C48.2 C71.1 C78.1 IC1.1 IC2.1 IC6.14 IC9.1 IC11.5 IC11.9 IC11.14 IC14.1 IC14.9 IC14.11 IC14.14 IC16.16 IC20.16 IC23.8 IC24.11 IC24.20 IC30.3 IC30.8 J3.2 J8.2 L3.2 L11.2 L12.2 LED1.A LED2.A P7.2 P7.3 P7.74 P7.75 R3.1 R5.1 R24.2 R32.1 R43.1 R86.2 R87.2 R103.2 R112.2 R113.2 R115.2 R116.1 R127.2 R128.1 R129.2 R130.2 R131.2 R134.2 R138.1 R142.1 R143.2
+5V: C14.1 C18.2 C20.1 C22.1 C69.2 C70.2 IC5.5 IC10.4 IC12.3 IC12.4 IC28.4 IC29.3
+24S: D3.C D6.C D7.C D8.C D9.C D10.C D11.C D12.C D18.3 D23.3 K2.11 K5.1 K6.1 P1.1 P3.12 P3.13 P3.14 P3.15 P3.23 P6.P$1 P6.P$2 P6.P$3 P6.P$4 P8.P$17
+24V: C8.1 C11.1 C27.1 C31.1 D22.3 D25.3 IC5.1 IC18.1 IC18.22 IC18.23 IC18.24 K2.14 K2.A1 K4.A1 Q9.4
-5V: C15.2 C17.1 C21.2 C67.1 C68.1 IC5.3 IC10.11 IC28.11
ADC6: IC27.19
AK_ACL: IC11.12 P7.98
AK_ADA: IC11.10 P7.99
AK_WAK: P7.23 R2.1
AK_WDA: P7.96 R1.1
ARM9_RESET: P7.53 Q30.3 R112.1
BYPASS_SOLENOID: IC8.2 Q8.4 R47.2
BYPASS_SOLENOID_DRIVE: D8.A P6.P$24 Q8.5 Q8.6
CHEM_LED: P6.P$36 R13.1
CHEM_PUMP_SOLENOID: C19.1 P7.116
CHEM_TUBE: IC6.12 P7.110
CHEM_TUBE_IN: P6.P$35 R14.2 R61.1
CLEAN_CART_SW1: P3.5 R80.2
CLEAN_CART_SW2: P3.18 R89.2
COND_ADDR0: IC20.2 P7.24
COND_ADDR1: IC20.14 P7.114
COND_CAP0: P7.21
COND_CAP1: C77.2 P7.89
COND_CAP2: P7.39
COND_CAP3: C79.2 P7.90
COND_CAP4: P7.121
COND_CAP5: C57.2 P7.88
COND_CAP6: P7.86
COND_CAP7: C58.2 P7.101
COND_SENSOR_1_OUTPUT: IC20.4 IC29.2 R134.1 R137.2
COND_SENSOR_1A: D26.3 P3.1 R125.1
COND_SENSOR_1B: P3.16 R8.2
COND_SENSOR_2_OUTPUT: IC20.3 IC29.14 R115.1 R121.2
COND_SENSOR_2A: D27.3 P3.2 R126.1
COND_SENSOR_2B: P3.17 R7.2
DISPLAY_RXD: IC16.13 P3.25
DISPLAY_TXD: IC16.14 P3.24
EXTERNAL_OUTPUT: IC8.12 Q13.1
FLOW1_FREQ: IC20.12 P3.7
FREQ_PULSE1: IC20.7 P7.35
FREQ_PULSE2: IC20.9 P7.111
HEATER_CLK: P7.56 P8.P$1
HEATER_DI: P7.37 Q32.3 R113.1
HEATER_DO: P7.55 P8.P$7
HEATER_LOAD: P7.100 P8.P$3
I2C_CLOCK: IC8.28 IC23.6 IC27.28 IC30.6 P3.27 P7.85 P8.P$20 R131.1
I2C_DATA: IC8.27 IC23.5 IC27.27 IC30.5 P3.26 P7.84 P8.P$19 R130.1
INLET_COND_OUTPUT: IC20.6 IC29.1 R141.2 R143.1
INLET_COND_SENSOR_A: D28.3 P6.P$40 R133.1
INLET_COND_SENSOR_B: P6.P$18 R11.2
INLET_SOLENOID: C12.1 IC8.15 J3.4 R46.2
INLET_VALVE_SOLENOID_DRIVE: D9.A P6.P$23 Q7.5 Q7.6 Q7.7 Q7.8
IOU_RESET: IC8.29 J3.5 Q31.3
MODULE_PRESSURE: D24.C IC8.19 P6.P$38
MODULE_TEMP: D4.C IC8.26 P6.P$37
MOTOR_PULSE: IC14.12 IC20.10
MOTOR_SPEED_OUT: P2.3 Q1.3
MOTOR_START_OUT: P2.2 Q2.3
N$1: IC10.13 IC10.14
N$2: IC27.26 R114.1
N$3: IC27.17 J8.3
N$4: C66.2 IC27.4 IC27.6 IC27.18 IC27.20 L12.1
N$5: LED2.C R114.2
N$6: C58.1 C60.1 IC28.10 R126.2
N$7: C57.1 C59.1 IC28.12 R125.2
N$8: P2.1 R26.1
N$9: C19.2 Q3.4 R30.2
N$10: C63.2 R118.1
N$11: D25.1 K2.A2 Q29.3
N$12: C62.2 IC29.4 R117.1 R118.2
N$13: IC27.29 J8.5
N$14: IC13.1 R59.2
N$15: C80.2 IC24.19
N$16: C76.2 IC24.18
N$17: C59.2 IC24.17
N$18: C60.2 IC24.16
N$19: C77.1 C80.1 IC28.5 R133.2
N$20: C76.1 C79.1 IC28.3 R132.2
N$21: J5.1 R93.2
N$22: IC13.2 IC13.3 IC13.4
N$23: IC13.5 IC15.9
N$24: IC11.1 IC11.4
N$25: C72.1 IC28.1 IC28.2
N$26: IC13.6 IC17.25 R58.1
N$27: C64.2 R119.1
N$28: C65.2 IC29.8 R119.2 R120.1
N$29: R71.2 R78.2 R84.1
N$30: IC29.5 R135.1 R137.1 R138.2
N$31: IC10.6 R70.1 R77.2
N$32: C30.2 K5.6 R77.1 R78.1
N$33: D18.1 K5.8 Q10.3
N$34: C12.2 Q7.4 R33.2 R46.1
N$36: IC14.4 P7.120
N$37: IC10.5 R69.1 R76.2
N$38: IC15.8 L4.P$2 R65.1
N$39: C30.1 R69.2 R71.1 R72.2
N$41: K5.5 R79.2
N$42: C72.2 R139.1
N$43: C75.2 IC29.10 R139.2 R145.1
N$44: IC16.12 P7.117
N$45: C23.2 IC15.1
N$46: D3.A Q3.5 Q3.6 Q3.7 Q3.8 R9.1
N$47: IC29.11 R123.1 R124.1 R128.2
N$48: P1.2 R9.2
N$49: R66.2 R73.1 R88.2
N$50: IC10.2 R67.1 R74.2
N$51: C36.2 K6.6 R66.1 R74.1
N$52: D23.1 K6.8 Q14.3
N$53: IC10.3 R68.1 R75.2
N$54: C23.1 IC15.3
N$55: C63.1 IC28.13 IC28.14
N$56: IC1.2 R1.2
N$57: C36.1 R68.2 R83.2 R88.1
N$58: IC2.2 R2.2
N$59: K6.5 R82.2
N$60: J2.1 R95.2
N$61: IC4.1 R36.1
N$62: IC3.1 R29.1
N$63: J1.2 R21.2
N$64: J1.4 R22.2
N$65: IC17.4 R90.2 R95.1
N$66: L2.P$2 P5.P$8 P5.P$14 P5.P$16
N$67: IC3.4 IC11.11 R3.2
N$68: IC4.4 IC11.13 R32.2
N$69: IC9.2 R23.2
N$70: IC9.4 IC15.10 IC17.24 R53.1
N$71: IC7.2 R59.1
N$72: K4.12 P5.P$13
N$73: K4.11 P5.P$2
N$74: K4.14 P5.P$1
N$75: J4.1 R94.2
N$77: J4.3
N$78: F4.P$2 IC4.2
N$79: IC21.4 R96.1 R97.1
N$80: IC17.2 IC21.3 R97.2
N$81: IC17.32 IC21.1
N$82: IC17.1 IC21.2
N$83: IC17.5 R92.1
N$84: C7.2 Q4.3 R25.2 R26.2
N$85: R38.2 R40.1 R54.2
N$86: IC10.9 R41.2 R57.1
N$87: C43.1 IC17.30 R91.1
N$88: C38.1 IC17.6
N$89: C26.2 IC15.4
N$90: IC10.10 R55.1 R56.2
N$91: C10.1 R38.1 R39.2 R55.2
N$92: L1.2 P2.4
N$93: D22.1 K4.A2 Q13.3
N$94: C26.1 IC15.5
N$95: C24.1 IC15.2
N$96: C28.1 IC15.6
N$97: IC29.9 R116.2 R121.1 R122.1
N$98: Q12.1 R44.2 R45.1
N$99: F2.P$2 IC2.4 R22.1
N$100: IC16.11 P7.118
N$101: C9.2 IC8.4 IC8.6 IC8.18 L3.1
N$102: LED1.C R48.2
N$103: Q12.3 R13.2 R16.2 R18.2 R20.2
N$104: IC8.17 J3.3
N$105: IC8.16 J3.1
N$106: IC8.30 J6.3
N$107: IC8.31 J6.2 R48.1
N$108: IC27.30 J7.3
N$109: IC27.31 J7.2
N$110: C2.2 D21.A L7.P$1 P5.P$5
N$111: C5.2 D16.A L8.P$1 P5.P$3
N$112: F1.P$2 IC1.4 R21.1
N$113: C6.2 D17.A L9.P$1 P5.P$15
N$114: C3.2 D15.A L6.P$1 P5.P$17
N$115: F3.P$2 IC3.2
N$116: D1.P$2 F1.P$3 P5.P$19
N$117: D2.P$2 F2.P$3 P5.P$7
N$118: IC15.7 L7.P$2
N$119: C4.2 D14.A L4.P$1 P5.P$4
N$120: D19.P$2 F4.P$3 P5.P$18
N$121: D13.P$2 F3.P$3 P5.P$6
N$122: L5.P$2
N$123: J4.2 L9.P$2
N$125: J2.2 L6.P$2
N$126: J5.2 L8.P$2
N$127: C1.2 D20.A L5.P$1 P5.P$20
N$128: IC14.13 Q4.1 R24.1
N$129: J5.3
N$130: J2.3
N$131: C32.2 IC16.3
N$132: C64.1 IC28.8 IC28.9
N$133: IC27.1 Q31.1
N$136: C73.2 R140.1
N$137: C74.2 IC29.6 R136.1 R140.2
N$138: IC29.7 R141.1 R142.2 R144.1
N$139: C73.1 IC28.6 IC28.7
N$141: IC27.2 Q30.1
N$143: C32.1 IC16.1
N$144: C34.1 IC16.4
N$145: C34.2 IC16.5
N$146: C33.1 IC16.2
N$147: C35.1 IC16.6
N$148: D5.3 P4.1 Q9.3 R28.2
N$149: Q11.3 R51.1
N$150: IC17.8 R94.1
N$151: IC17.7 R92.2 R93.1
N$152: Q9.1 R28.1 R51.2
N$153: D5.1 Q11.1 R52.2
N$155: IC22.1 Q15.3 R105.1
N$156: IC22.7 Q15.4
N$157: IC6.5 R60.1
N$158: IC22.2 R102.1
N$159: C52.1 R102.2
N$160: L11.1 Q15.5 Q15.6 Q15.7 Q15.8
N$161: C53.1 IC22.4
N$162: C54.1 IC22.3 R103.1 R104.2
N$163: IC6.1 R49.1
N$164: IC6.9 R17.1
N$165: IC6.11 R15.1
N$166: IC6.13 R14.1
N$167: IC14.3 R80.1 R87.1
N$168: IC14.5 R86.1 R89.1
N$170: IC14.6 P7.40
N$171: IC17.27 X1.3
N$172: IC17.28 X1.1
N$173: IC23.1 X2.1
N$174: IC23.2 X2.4
N$175: G1.+ IC23.3
PROD_COND_OUTPUT: IC20.5 IC29.13 R123.2 R127.1
PROD_COND_SENSOR_A: D29.3 P6.P$41 R132.1
PROD_COND_SENSOR_B: P6.P$19 R27.2
PROD_TEMP_A: P6.P$20 R72.1 R79.1 R85.2
PROD_TEMP_B: K5.7 P6.P$42
PROD_TEMP_SIM_EN: IC8.10 Q10.1
PRODUCT_FLOW_DETECT: P7.38 R50.2
PRODUCT_FLOW_DETECT_IN: IC6.3 IC27.16 J8.1 R5.2
PRODUCT_FLOW_PULS_IN: C61.2 IC27.15 J8.4 P6.P$33 R15.2 R62.1 R129.1
PRODUCT_FLOW_PULSE: IC6.10 IC20.11
PRODUCT_TEMP: IC8.24 IC10.7 R70.2
R: IC7.4 IC11.3 R43.2
REF: C13.2 IC8.20 IC12.5 R31.1 R81.1 R85.1
REJECT_SOLENOID: IC8.7 Q5.2 R35.2
REJECT_SOLENOID_DRIVE: D7.A P6.P$25 Q5.7 Q5.8
REJECT_TEMP: IC8.23 IC10.1 R67.2
REJECT_TEMP_A: P6.P$22 R81.2 R82.1 R83.1
REJECT_TEMP_B: K6.7 P6.P$44
REJECT_TEMP_SIM_EN: IC8.11 Q14.1
RELAY_24V: IC27.8 Q29.1
RETURN_SOLENOID: IC8.8 Q8.2 R42.2
RETURN_SOLENOID_DRIVE: D6.A P6.P$26 Q8.7 Q8.8
RETURN_TEMP: IC8.25 IC10.8 R57.2
RETURN_TEMP_A: P6.P$21 R31.2 R39.1
RETURN_TEMP_B: C10.2 P6.P$43 R41.1 R54.1
RO_PUMP_RELAY: IC8.14 Q2.1 Q6.4 R4.1
RO_PUMP_RELAY_DRIVE: D10.A P3.28 Q6.5 Q6.6
RX0: IC11.2 P7.42
SENSOR_LED_ENABLE: P7.26 R44.1
SPARE_VALVE_SOLENOID: IC8.32 Q6.2 R37.2
SPARE_VALVE_SOLENOID_DRIVE: D11.A P3.29 Q6.7 Q6.8
TANK_EMPTY: IC6.8 P7.112
TANK_EMPTY_IN: P6.P$31 R17.2 R63.1
TANK_EMPTY_LED: P6.P$32 R16.1
TANK_HIGH: IC6.6 P7.115
TANK_HIGH_IN: P6.P$27 R60.2 R64.1
TANK_HIGH_LED: P6.P$28 R20.1
TANK_LOW: IC6.2 P7.22
TANK_LOW_IN: P6.P$29 R19.1 R49.2
TANK_LOW_LED: P6.P$30 R18.1
TX0: P7.43 R23.1
V5_SOLENOID: IC8.1 Q5.4 R34.2
V5_SOLENOID_DRIVE: D12.A P3.30 Q5.5 Q5.6
VCC: C41.1 C42.1 C44.1 C46.+ C49.1 C50.1 C55.2 IC18.11 IC18.14 IC19.1 IC22.8 J6.1 J7.1 L1.1 P3.6 P3.8 P3.10 P6.P$6 P6.P$8 P6.P$10 P6.P$12 P6.P$34 P6.P$39 P7.70 P7.71 P7.142 P7.143 P8.P$15 P8.P$18 Q12.2 R19.2 R45.2 R61.2 R62.2 R63.2 R105.2
VCC_FT: C37.2 IC17.3 IC17.13 IC17.14 IC17.26 L10.1
XXB: IC6.4 P8.P$13 R50.1
XXC: D30.C P8.P$5 Q32.1
XXD: IC8.13 Q1.1
ZE0V: C1.1 C2.1 C3.1 C4.1 C5.1 C6.1 C16.1 C25.2 C28.2 C37.1 C38.2 C43.2 C47.1 C51.1 D1.P$1 D2.P$1 D13.P$1 D14.C D15.C D16.C D17.C D19.P$1 D20.C D21.C F1.P$1 F2.P$1 F3.P$1 F4.P$1 IC1.3 IC2.3 IC9.3 IC13.7 IC15.15 IC17.9 IC17.17 IC17.18 IC17.19 IC17.20 IC17.22 IC17.29 IC17.31 IC19.10 IC19.15 IC21.5 L2.P$1 R58.2 R90.1 X1.2
ZE5V: C16.2 C24.2 C25.1 C47.2 C51.2 IC7.1 IC13.8 IC13.9 IC13.11 IC13.12 IC13.14 IC15.11 IC15.13 IC15.16 IC19.12 IC19.13 IC21.6 IC21.8 J1.1 J1.3 L10.2 R29.2 R36.2 R53.2 R65.2 R91.2 R96.2

## Tracks (layer width: path | path; a pad name or v marks a point on that pad's centre or on a via)
0V  (via drill 0.6)  (149 unrouted)
  Top 0.254: 21.32,102.89 21.34,102.87 C18.1 v22.86,102.87 | 21.32,104.63 C17.2 | R40.2 v16.51,114.3 R56.1 | R73.2 v7.62,88.9 | R75.1 15.16,90.25 v15.24,88.9 15.32,89.23 | v21.08,85.34 R84.2 | R76.1 v19.05,88.9 | C69.1 26.42,20.32 26.4,20.34 | R117.2 7.54,33.96 v7.37,33.78 7.37,36.43 D26.1 | v8.89,26.67 C62.1 | R124.2 38.35,30.48 38.43,30.56 38.35,30.63 v38.35,31.75 38.35,32.94 R122.2 | C70.1 45.47,20.32 | 45.47,22.84 C68.2 | R135.2 37.59,14.81 v37.59,15.24 | R144.2 v41.91,6.35 | Q14.2 30.24,100.58 v31.5,101.6 | Q10.2 30.24,119.63 v31.75,119.63 | R120.2 22.86,32 22.35,32 21.59,31.24 21.59,28.96 22.1,28.45 22.62,28.45 C65.1 22.86,28.19 23.62,28.19 24.89,29.46 v24.89,29.72 25.72,30.55 D27.1 | 7.62,7.89 C75.1 | 7.62,7.89 v7.11,7.87 | v21.34,13.97 R136.2 22.94,12.45 25.4,12.45 | IC11.7 140.46,100.33 v140.21,100.58 | Q13.2 138.18,106.78 138.18,105.41 v137.92,105.16 | Q5.1 99.82,123.95 | R34.1 109.22,120.34 v109.22,121.41 | R37.1 110.24,116.89 v110.49,117.09 | R47.1 77.55,114.63 v75.95,114.55 | C13.1 97.27,106.43 97.79,106.43 v98.3,106.93 | IC27.5 154.33,27.43 151.89,27.43 151.13,26.67 148.34,26.67 147.57,27.43 147.57,27.94 | v145.8,27.94 147.57,27.94 | 147.57,27.94 C66.1 | C61.1 v173.23,30.48 | IC27.21 164.97,28.32 v165.1,28.19 | IC27.3 153.01,29.11 v152.15,29.72 152.33,29.91 Q29.2 152.33,37.78 152.65,38.1 155.96,38.1 | 155.96,38.1 160.27,38.1 160.53,37.85 160.53,37.59 161.04,37.08 160.97,37.02 Q31.2 | Q32.2 167.32,35.63 v167.39,35.56 | Q30.2 155.89,38.03 155.96,38.1 | 7.11,7.38 7.62,7.89 | R145.2 12.7,4.06 11.18,2.54 8.64,2.54 8.13,3.05 8.13,3.79 D29.1 7.87,4.05 7.87,4.06 7.11,4.83 v6.6,4.83 | 25.4,12.45 C74.1
  Top 0.254: D28.1 25.4,14.12 25.4,12.45 | Q1.2 22.39,129.24 v23.11,128.52 22.61,128.02 22.55,127.31 Q4.2 | v28.96,133.1 29.04,133.01 Q2.2 29.02,131.76 | R25.1 28.57,127.38 27.94,128.02 v26.92,128.02 | R52.1 143.51,113.03 | Q11.2 143.51,115.67 143.51,113.03 | 143.51,113.03 143.26,112.27 142.49,111.51 v139.95,111.51 | P4.2 139.22,132.62 136.65,130.05 136.14,130.05 135.89,129.79 R8.1 133.43,129.87 133.35,129.79 R7.1 | 20.83,71.48 IC20.8 | 8.89,73.91 C40.1 | 13.21,77.37 IC20.15 | 16,77.37 IC20.13 | v58.67,115.57 58.67,117.32 IC6.7 58.42,117.6 59.11,117.6 R33.1 | R30.1 8.71,121.16 v6.86,121.16 | IC14.7 111,94.21 v111,92.71 | 93.22,93.12 IC16.15 | C29.2 86.6,89.41 | C35.2 102.62,83.84 v102.62,85.6 102.46,85.6 IC16.8 | IC16.10 99.57,93.37 99.57,94.74 v98.81,95.5 | Q15.1 Q15.2 | Q15.1 58.99,64.71 58.93,64.77 | Q15.1 57.72,64.71 v57.66,64.77 | C52.2 46.99,59.69 49.53,57.15 | C54.2 57.79,57.02 57.15,57.66 R104.1 v57.15,55.63 51.05,55.63 49.53,57.15 | 49.53,57.15 C53.2 | R64.2 75.62,105.41 v74.42,105.41 71.46,105.41 D24.A | C7.1 34.29,128.02 v35.31,129.03 | 29.02,131.76 28.96,131.83 | R4.2 Q2.2 29.02,131.76 | IC12.2 91.19,100.84 91.69,100.33 93.22,100.33 v93.73,100.84 | R11.1 44.45,128.52 46.74,126.24 46.74,125.73 R27.1 46.74,125.65 v46.74,124.21 | P6.P$17 50.55,133.6 D4.A | IC29.12 35.56,23.88
  Top 0.406: C17.2 21.32,102.89 | 21.32,104.63 20.83,104.14 12.19,104.14 11.43,104.9 IC10.12 | 99.82,123.95 99.82,125.98 100.08,126.24 v100.84,126.24 101.85,126.24 102.23,125.86 Q5.3 | Q6.1 106.68,125.48 107.19,125.98 v109.22,125.98 Q6.3 | C9.1 96.89,123.08 v97.79,122.17 | IC8.3 99.59,120.37 v97.79,122.17 | IC8.5 98.04,121.92 v97.79,122.17 | v86.36,116.84 R42.1 | R35.1 v86.36,119.38 | Q8.1 68.58,120.65 69.34,121.41 v69.85,121.41 70.36,121.41 71.12,120.65 Q8.3 | C22.2 87,99.18 87.38,98.81 v88.65,98.81 | 145.05,12.94 v145.03,12.95 145.99,13.91 146.05,13.91 | 149.29,13.91 IC30.2 | 149.29,13.91 IC30.1 146.05,13.91 | 149.29,13.91 149.35,13.97 | 149.22,19.18 149.1,19.3 | 149.22,19.18 IC30.7 | 149.35,13.97 149.35,19.05 149.22,19.18 | 149.35,13.97 149.35,15.49 150.11,16.26 151.13,16.26 151.64,15.75 151.64,13.72 151.76,13.84 IC30.4 | 159.51,13.78 159.51,11.18 156.97,8.64 | 20.83,71.48 20.83,73.15 20.07,73.91 16,73.91 | 13.21,73.91 8.89,73.91 v8.89,72.39 11.02,72.39 IC20.1 | 13.21,73.91 16,73.91 | 13.21,73.91 13.21,77.37 | 16,73.91 16,77.37 | 93.22,93.12 93.22,91.69 92.96,91.44 v90.42,91.44 89.41,91.44 87.38,89.41 86.6,89.41 | C71.2 146.05,15.51 146.05,13.91 | 156.97,8.64 G1.- | C78.2 154.92,8.64 156.97,8.64 | P7.1 142.2,62.52 v142.24,62.48 | P7.73 140.34,52.2 v140.46,52.07 | P7.10 133.54,61.15 132.84,60.45 v131.83,60.45 130.05,60.45 129.54,60.96 P7.15 | P7.103 112.54,52.85 112.01,52.32 v109.47,52.32 108.54,53.26 P7.108 | P7.113 104.54,52.97 104.14,52.58 103.12,52.58 v102.87,52.32 | P7.123 96.54,57.67 v97.79,58.93 | P7.119 99.82,54.41 99.82,57.66 98.55,58.93 v97.79,58.93 | P7.51 97.03,62.43 97.03,59.69 v97.79,58.93
  Top 0.406: P7.47 100.14,61.27 v97.79,58.93 | P7.36 108.94,64.04 v107.95,65.02 | P7.41 104.94,64.99 104.39,65.53 v102.87,65.53 | P7.31 112.94,64.93 v113.03,65.02 | P7.30 117.54,64.96 v117.6,65.02 | P7.61 88.94,59.22 v88.9,59.18 88.54,58.82 P7.133 | P7.65 85.74,60.59 v84.84,59.69 84.14,60.39 P7.67 | P7.137 85.34,56.14 v84.58,56.9 83.74,56.05 P7.139 | P7.72 78.78,62.52 v78.74,62.48 | P7.144 79.03,54.32 v78.23,54.36 | P7.25 121.54,64.64 v121.92,65.02 | P7.102 117.14,52.37 v117.09,52.32 | P7.97 121.14,52.35 v121.16,52.32 | P7.87 129.14,52.68 128.52,52.07 v128.52,51.31 | P7.82 133.14,52.79 v134.11,51.82 | C44.2 42.04,69.73 v41.66,69.34 41.15,68.83 41.15,67.31 41.22,67.31 IC22.6 | IC8.21 98.81,107.44 v98.3,106.93
  Top 0.813: 26.4,20.34 C67.2 | 26.42,20.32 v27.94,20.32 | 45.47,20.32 45.47,22.84 | C70.1 v46.99,20.32
  Top 1.016: C20.2 124.46,101.73 C14.2 | C21.1 129.54,101.73 C15.1 | C42.2 109.35,73.66 C41.2 | v45.97,76.2 C39.2 | C50.2 69.85,60.83 v69.85,58.93 | C31.2 118.87,86.36 118.87,90.68 C27.2 | C11.2 130.81,120.65 C8.2
  Route15 0.254: 7.62,8.64 7.37,8.38 7.11,8.38 | v21.34,13.97 22.61,13.97 | 12.45,49.28 12.19,49.28 | 142.49,116.33 143.26,116.33 | v140.21,100.58 139.7,101.09 | v137.92,105.16 137.92,104.39 | v100.84,126.24 101.6,126.24 | v109.22,121.41 109.47,121.67 | v110.49,117.09 109.98,115.82 | v58.67,115.57 58.42,115.32 | v69.85,121.41 70.36,121.41 | v75.95,114.55 75.44,115.57 | v93.73,100.84 93.73,101.35 | 89.92,112.52 89.41,112.78 | v145.8,27.94 145.29,27.94 | v173.23,30.48 172.72,30.48 | v165.1,28.19 165.1,28.45 165.61,28.96 | v152.15,29.72 152.4,30.23 | v167.39,35.56 168.15,35.56 | 20.07,128.02 v23.11,128.52 | v28.96,133.1 28.45,133.1 | v26.92,128.02 26.42,128.78 | v46.74,124.21 47.5,123.95 | v8.89,72.39 8.89,71.63 | v6.86,121.16 6.6,121.67 | v111,92.71 111,92.96 | v90.42,91.44 89.92,91.44 | v102.62,85.6 102.62,86.36 | v98.81,95.5 99.31,95.5 | v57.66,64.77 57.15,64.77 | v41.66,69.34 40.89,72.64 | v57.15,55.63 57.15,55.12 | 45.21,76.2 v45.97,76.2 | v74.42,105.41 71.63,105.41 | v6.6,4.83 6.1,4.83 | v35.31,129.03 35.56,129.29
  Route15 0.406: v16.51,114.3 16.76,114.55 | v22.86,102.87 23.11,102.87 | v7.62,88.9 7.62,89.41 | v15.24,88.9 17.02,90.17 | v21.08,85.34 22.86,83.57 | v19.05,88.9 19.3,88.9 | 26.67,20.57 26.67,20.32 | v7.37,33.78 7.37,33.27 | v8.89,26.67 9.14,26.92 | 40.64,31.75 40.89,31.75 | 49.53,20.57 49.53,20.32 | 39.62,15.24 39.88,15.24 | 44.7,6.35 44.45,6.35 | 30.48,110.74 30.48,111.25 | 30.48,105.66 30.48,105.92 | v24.89,29.72 24.89,29.21 | v109.22,125.98 109.22,127 | v97.79,122.17 98.3,122.17 | 109.73,121.67 109.47,121.67 109.22,121.67 | v98.3,106.93 96.77,106.68 96.77,106.43 | 85.6,115.57 v86.36,116.84 | v88.65,98.81 87.88,98.55 | v145.03,12.95 145.03,13.46 | v142.24,62.48 143,62.48 | v140.46,52.07 140.46,51.31 | v131.83,60.45 131.32,60.45 | v109.47,52.32 109.47,52.58 | v102.87,52.32 102.36,52.32 | v97.79,58.93 98.55,56.9 | v107.95,65.02 107.44,65.02 | v102.87,65.53 101.85,65.53 | v113.03,65.02 113.28,65.02 113.54,64.77 | v117.6,65.02 118.11,65.02 | v88.9,59.18 89.66,59.18 | v84.84,59.69 85.09,59.69 85.34,59.44 | v84.58,56.9 84.07,56.9 83.82,57.15 | 77.98,62.48 v78.74,62.48 | v78.23,54.36 78.49,54.36 | v121.92,65.02 122.68,65.02 | 116.33,52.32 v117.09,52.32 | v121.16,52.32 121.67,52.32 | v128.52,51.31 128.52,50.8 | v134.11,51.82 134.87,51.82
  Route15 1.016: 69.85,57.91 v69.85,58.93
  pour Route15: 1.52,148.59 151.38,148.59 151.13,53.34 196.85,53.34 196.85,2.54 151.38,2.29 1.52,2.29 2.03,148.59
+3V3  (via drill 0.6)  (47 unrouted)
  Top 0.254: 33.27,27.94 R127.2 33.1,27.94 v33.02,25.91 | 33.27,5.59 33.27,6.27 R143.2 v31.75,6.35 | R134.2 v36.83,13.97 | R3.1 149.3,134.37 v149.61,134.37 | R32.1 147.57,120.6 v147.57,119.38 147.83,119.13 147.83,117.86 147.88,117.86 R43.1 | IC11.14 149.1,107.97 v149.1,109.22 | IC11.5 144.53,102.87 v145.29,102.11 | L3.2 96.77,127.76 v96.77,130.05 | IC14.9 v109.47,102.87 109.22,102.62 106.93,102.62 106.68,102.36 IC14.11 | IC14.14 102.62,100.61 v102.62,98.81 | LED1.A 106.17,111.48 106.17,108.46 v107.44,107.19 | IC6.14 v49.53,124.97 49.28,124.97 48.26,125.98 48.26,127.33 | v178.31,39.88 178.28,39.91 LED2.A 174.22,40.89 171.2,40.89 170.18,39.88 | R129.2 v172.72,27.94 | v154.18,19.05 154.24,19.11 | 170.18,38.86 R113.2 170.18,39.88 | R112.2 163.32,40.89 164.34,41.91 168.91,41.91 170.18,40.64 170.18,39.88 | 25.4,127.51 R24.2 | 25.4,127.51 25.4,128.27 | 25.4,127.51 25.4,128.78 v24.89,129.29 | R115.2 33.27,35.64 v33.27,38.86 | 11.84,77.72 IC20.16 | IC14.1 102.34,95.25 v101.35,95.25 | v107.95,83.31 108.46,83.82 R86.2 | R87.2 v119.63,83.82 | R103.2 54.61,59.44 53.34,60.71 v53.34,61.47 | C33.2 v95.25,83.82 | v41.91,11.43 R138.1 40.39,11.35 40.39,8.89 R142.1 | R128.1 41.15,27.94 v42.16,28.96 | R116.1 v42.16,35.56 | IC11.9 150.37,101.6 150.62,101.35 150.62,99.82 v149.61,98.81
  Top 0.406: 147.57,25.4 v145.8,25.4 | 147.57,25.4 R130.2 | 147.57,25.4 147.57,22.86 R131.2 147.83,22.86 147.83,19.11 | 147.83,19.11 147.83,19.05 | 147.83,19.11 IC30.8 | C40.2 v8.89,77.72 11.84,77.72 | IC16.16 v90.42,93.22 88.41,93.22 C29.1 | C71.1 144.78,18.8 147.51,18.8 147.83,19.11 | IC30.3 150.37,13.78 150.37,12.19 148.59,10.41 v148.59,10.16 | C78.1 151.38,10.18 151.38,11.18 154.18,13.97 v154.18,19.05 | P7.3 P7.2 139.95,62.52 | 139.95,62.52 139.95,62.48 | 139.95,62.52 v139.95,60.71 | 138.68,54.32 P7.75 | 138.68,54.32 P7.74 139.45,54.32 139.45,52.83 v138.94,52.32 | 138.68,54.32 138.68,54.36 | L12.2 147.19,32.89 v147.32,33.02
  Top 1.016: 55.37,76.2 L11.2 | C45.+ 55.37,76.2 | 55.37,76.2 C39.1
  Route2 0.254: 17.78,49.53 18.03,49.53 | v149.61,134.37 148.59,134.37 | v149.1,109.22 149.1,109.73 | v145.29,102.11 145.29,101.6 | v96.77,130.05 96.77,130.81 | 102.87,105.92 102.87,105.66 | v102.62,98.81 102.11,97.79 | v109.47,102.87 108.71,102.87 | 104.9,107.44 v107.44,107.19 | v49.53,124.97 51.82,125.98 | 177.8,35.05 178.31,35.56 | v172.72,27.94 173.23,27.94 | v154.18,19.05 154.18,19.81 | v24.89,129.29 24.64,129.54 | v33.27,38.86 33.78,38.86 | v8.89,77.72 9.65,77.72 | v90.42,93.22 89.92,93.47 | v101.35,95.25 101.09,95.5 | v107.95,83.31 106.93,83.31 | v119.63,83.82 120.14,83.82 | v41.91,11.43 42.42,11.43 | v42.16,28.96 41.4,28.96 | v42.16,35.56 42.16,35.05 | v149.61,98.81 149.1,98.81
  Route2 0.406: 34.29,29.46 34.54,29.21 | 34.29,6.35 33.78,6.35 | v145.8,25.4 145.03,25.4 | v148.59,10.16 148.59,10.67 | v139.95,60.71 139.95,60.2 | v138.94,52.32 138.94,51.82 | v147.32,33.02 147.32,33.53
  Bottom 0.254: v53.34,61.47 53.34,65.02 51.31,67.06 49.53,67.06 48.01,68.58 C45.+
  pour Route2: 2.03,148.84 151.38,148.84 151.38,53.59 197.61,53.59 197.61,2.29 1.78,2.29 1.78,148.84
+5V  (via drill 0.6)
  Top 0.254: 12.95,103.12 12.7,102.87 | C18.2 19.05,102.87 18.8,103.12 | v16.26,21.34 15.75,20.83 IC28.4 | v35.56,20.32 IC29.3 | IC12.4 90.2,98.55 90.17,98.55 90.17,101.06 IC12.3
  Top 0.406: 12.7,102.87 IC10.4 | 18.8,103.12 12.95,103.12 | IC12.3 90.2,101.09 90.42,101.09 89.41,102.11 85.98,102.11 C22.1 v82.04,100.33 | 8.91,55.37 9.65,55.37 10.16,54.86 10.16,53.59 11.94,51.82 v12.6,51.82 12.7,51.82 | v124.71,78.74 123.7,77.72 105.92,77.72 103.89,75.69 99.82,75.69 99.57,75.95 v83.06,75.95
  Top 0.813: v22.11,21.34 23.11,20.32 C69.2 24.38,20.32 24.38,19.3 v24.64,18.8 | v41.91,20.32 C70.2 v41.91,20.32
  Top 1.016: C14.1 121.92,101.73 C20.1 121.92,101.6 | C18.2 19.3,102.85 19.3,101.6 19.56,101.35 23.37,101.35 23.88,101.85 | 23.88,101.85 24.38,102.36 24.38,103.89 23.37,104.9 v23.37,119.89 | 23.88,101.85 26.67,99.06 32.77,99.06 35.81,96.01 35.81,52.32 v35.31,51.82 v35.3,51.82 | v118.87,118.62 121.92,115.57 IC5.5 | v47.75,51.82 48.01,51.56 48.01,37.08 45.72,34.8 45.72,28.19 47.75,26.16 v47.75,23.11 | v12.6,51.82 12.7,51.31 12.7,49.28 12.6,49.28 | v35.3,51.82 v35.3,51.83 | v35.3,51.82 35.3,49.3
  Bottom 0.406: 118.87,132.33 118.11,133.1 118.11,138.68 | C14.1 124.71,103.89 v124.71,78.74 | v83.06,75.95 82.8,75.95 82.8,97.79 82.04,98.55 v82.04,100.33
  Bottom 0.813: v22.11,21.34 v16.26,21.34 | v24.64,18.8 30.23,18.8 31.75,20.32 v35.56,20.32 v41.91,20.32 44.96,20.32 v47.75,23.11 | v12.6,51.82 v35.31,51.82 v47.75,51.82
  Bottom 1.016: C14.1 124.46,108.97 IC5.5 | v23.37,119.89 23.37,125.73 24.38,126.75 30.23,126.75 32.77,129.29 32.77,137.92 35.81,140.97 115.82,140.97 118.11,138.68 | 118.87,132.33 v118.87,118.62
+24S  (via drill 0.6)  (2 unrouted)
  Top 0.254: 34.23,114.55 29.21,114.55 D18.3 29.46,114.22 D23.3
  Top 0.406: P3.12 P3.13 | v93.47,122.68 93.22,122.43 91.44,122.43 D12.C 91.2,122.41 91.19,122.43 91.17,122.41 D11.C 88.9,122.43 88.88,122.41 D10.C 86.36,122.43 86.34,122.41 D9.C 83.82,122.43 83.8,122.41 D8.C 81.28,122.43 81.26,122.41 D7.C 78.74,122.43 78.72,122.41 D6.C | 29.21,114.55 24.38,114.55 24.38,121.67 23.37,122.68 19.56,122.68 17.78,124.46 v17.02,124.46 | v16.76,128.52 14.73,130.56 14.73,131.46 D3.C 14.59,131.57 14.48,131.57
  Top 1.016: v119.89,98.3 v146.81,98.3 | v149.1,42.93 v176.28,42.93 | 14.48,131.57 14.48,134.19 14.4,134.19 12.68,135.91 P1.1 | v113.28,144.02 114.3,143 P3.23
  Bottom 0.406: 115.57,132.33 115.57,135.89 P3.23 114.3,137.92 112.78,139.45 106.43,139.45 105.41,138.43 105.41,135.89 P3.12 | P6.P$4 P6.P$3 P6.P$2 P6.P$1 | P3.13 P3.14 P3.15 P6.P$1 | P6.P$1 93.47,131.32 v93.47,122.68 | v17.02,124.46 16.76,124.71 v16.76,128.52
  Bottom 1.016: 115.57,132.33 115.57,131.83 116.33,131.06 116.33,126.49 K2.11 116.33,122.43 116.33,115.06 117.86,113.54 117.86,105.41 119.89,103.38 v119.89,98.3 | v176.28,42.93 176.28,17.78 173.74,15.24 P8.P$17 | v113.28,144.02 15.75,144.02 12.7,140.97 12.7,135.89 12.68,135.91 P1.1 | v146.81,98.3 143,94.49 143,67.06 146.81,63.25 146.81,45.21 v149.1,42.93
+24V  (via drill 0.6)
  Top 0.254: v114.3,96.01 114.3,95.76 116.5,97.96 D25.3
  Top 0.305: D22.3 136.48,113.88 134.37,111.76 129.79,111.76 127.13,114.43
  Top 1.016: K2.14 123.19,129.54 IC5.1 125.98,128.27 128.27,125.98 | K4.A1 145.03,93.73 142.75,93.73 139.95,96.52 IC18.24 | IC18.24 136.91,96.52 | 114.3,95.76 C27.1 116.08,90.93 116.08,86.36 C31.1 | 128.27,125.98 130.05,127.76 135.69,127.76 136.91,126.54 Q9.4 136.91,125.22 | 128.27,125.98 C8.1 128.02,125.48 128.02,120.65 C11.1 128.02,120.53 128.02,115.32 127.13,114.43 124.46,111.76 v116.59,111.76 | v114.3,96.01 121.67,96.01 121.92,96.27 IC18.1 IC18.24
  Bottom 1.016: v114.3,96.01 K2.A1 116.59,106.43 v116.59,111.76 | IC18.24 IC18.23 IC18.22
-5V  (via drill 0.6)
  Top 0.254: 19.3,105.41 19.05,105.16 | IC28.11 15.75,23.11 v16.26,22.61 | 35.56,22.1 35.31,21.84 v35.31,21.59
  Top 0.406: IC10.11 12.7,105.41 12.95,105.16 19.05,105.16
  Top 0.813: v21.84,22.61 22.1,22.86 C67.1 24.38,22.88 24.38,23.88 v25.15,24.64 | C68.1 43.2,22.61 42.67,22.61 v41.66,21.84
  Top 1.016: C17.1 19.3,105.41 19.3,106.17 v21.84,108.71 v21.84,121.41 | v25.15,24.64 29.21,28.7 v29.21,85.09 | v47.24,108.71 v47.24,85.09 | C21.2 132.08,101.73 C15.2 132.08,106.93 130.3,108.71 v122.17,108.71
  Bottom 0.406: 122.17,132.33 120.65,133.86 120.65,138.43